# Altium PCB PreTriggerECAL_v3.PcbDoc (part 1 of 3)
Units mm, origin at the board's own origin, x right, y up, seen from the top; angles counter-clockwise.
Board outline 200 x 130 mm, 8 copper layers (Top Layer, Internal Plane 1, Mid-Layer 1, Mid-Layer 2, Mid-Layer 3, Mid-Layer 4, Mid-Layer 5, Bottom Layer), stack 1.695 mm thick; 121 components, 209 nets, 2107 pads, 421 vias.
Unrouted connection lines stored in the file: 26.
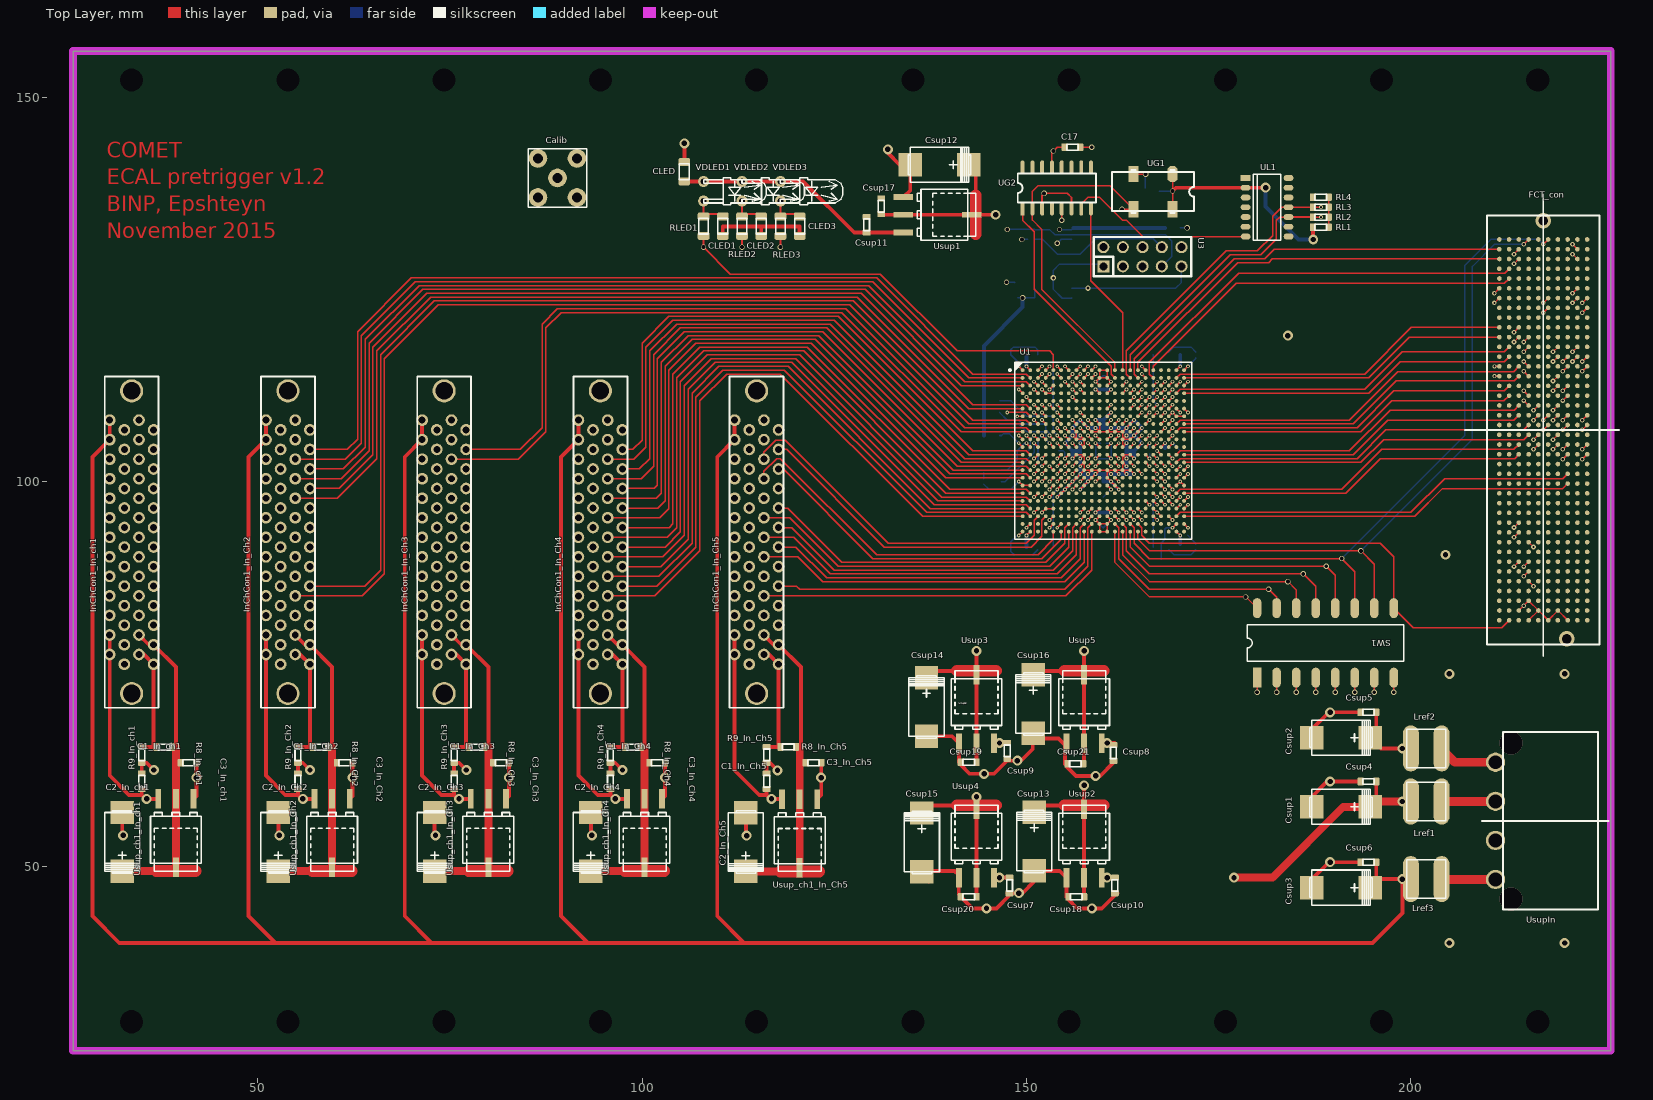
[diagram p0: Top Layer view]
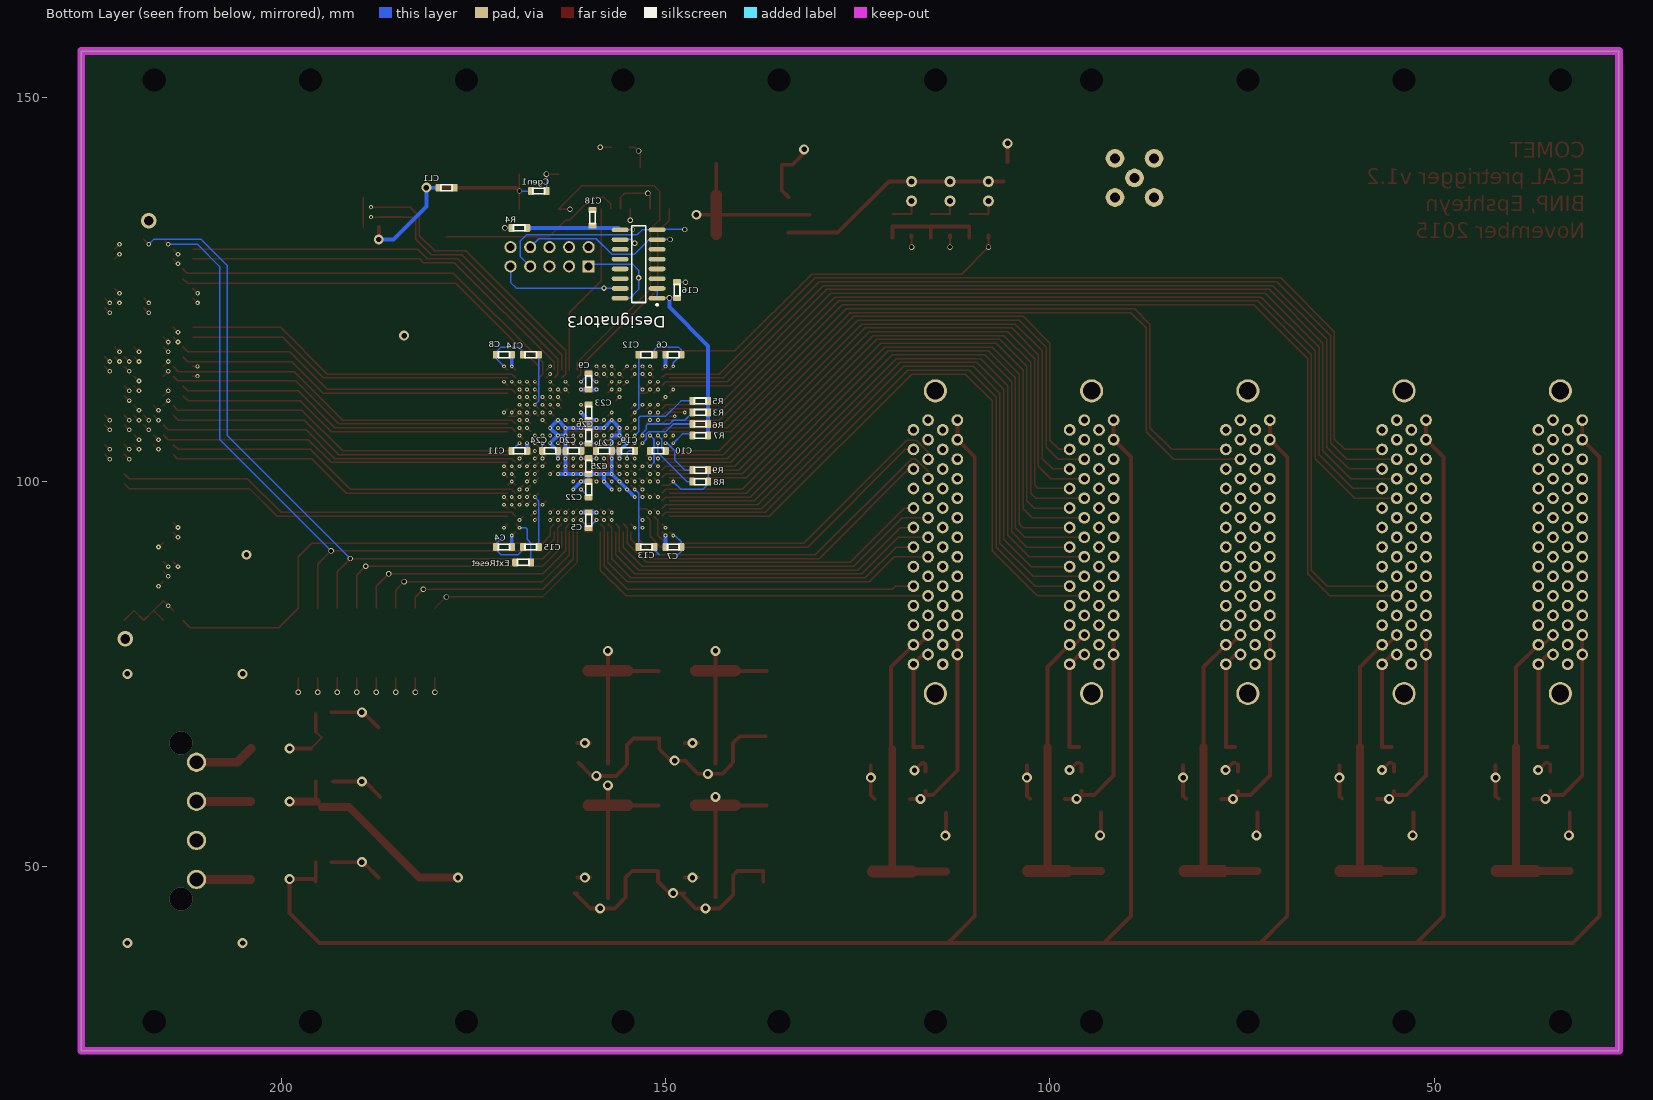
[diagram p1: Bottom Layer view, seen from below]
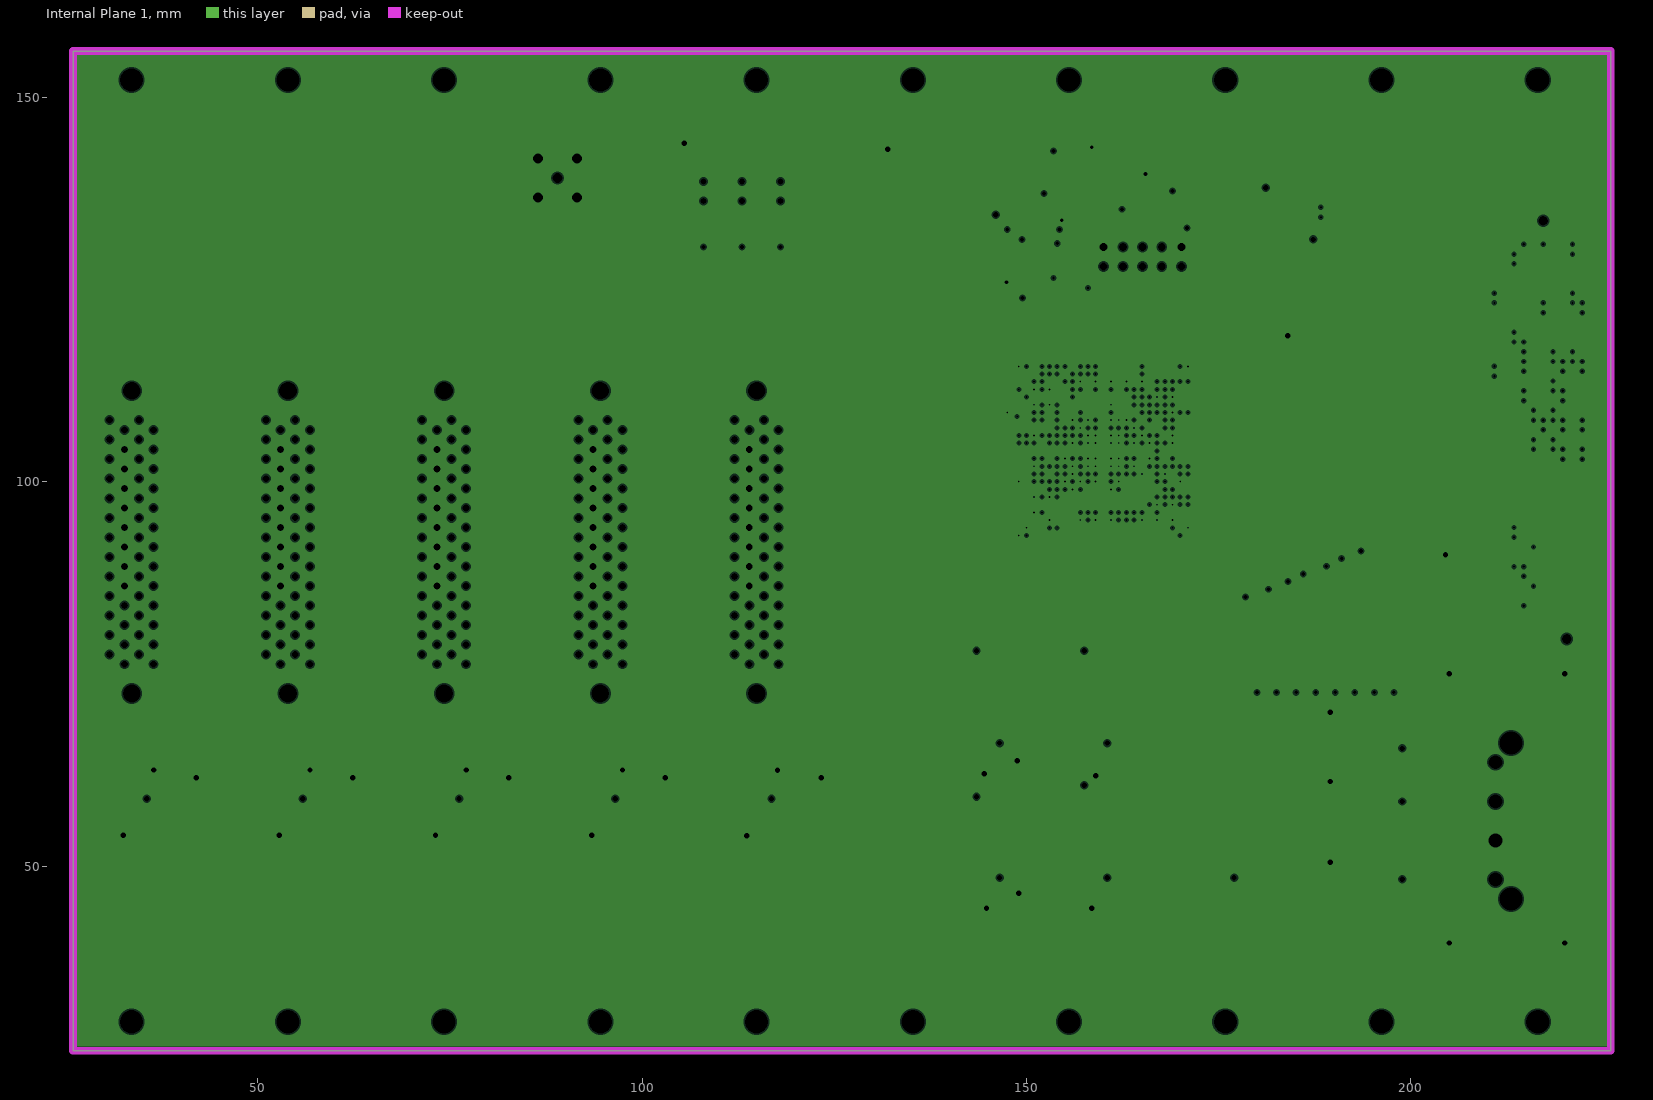
[diagram p2: Internal Plane 1, clearances drawn from the general rule]
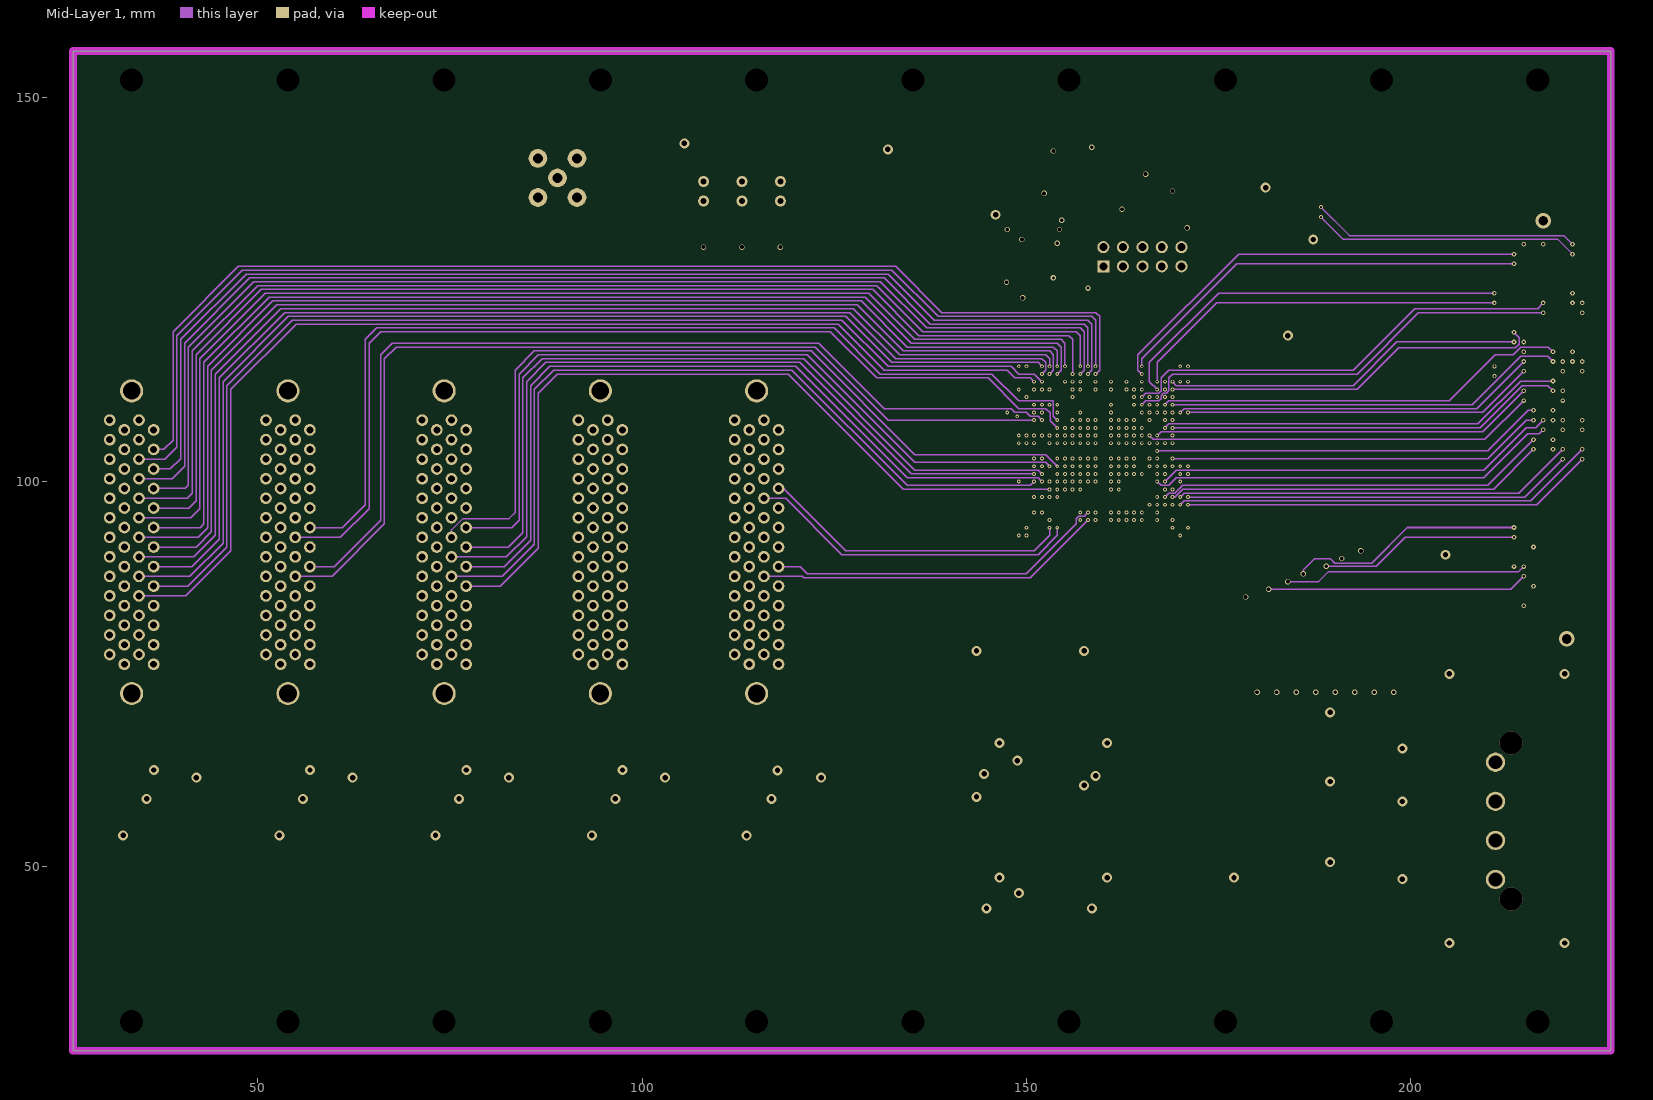
[diagram p3: Mid-Layer 1]
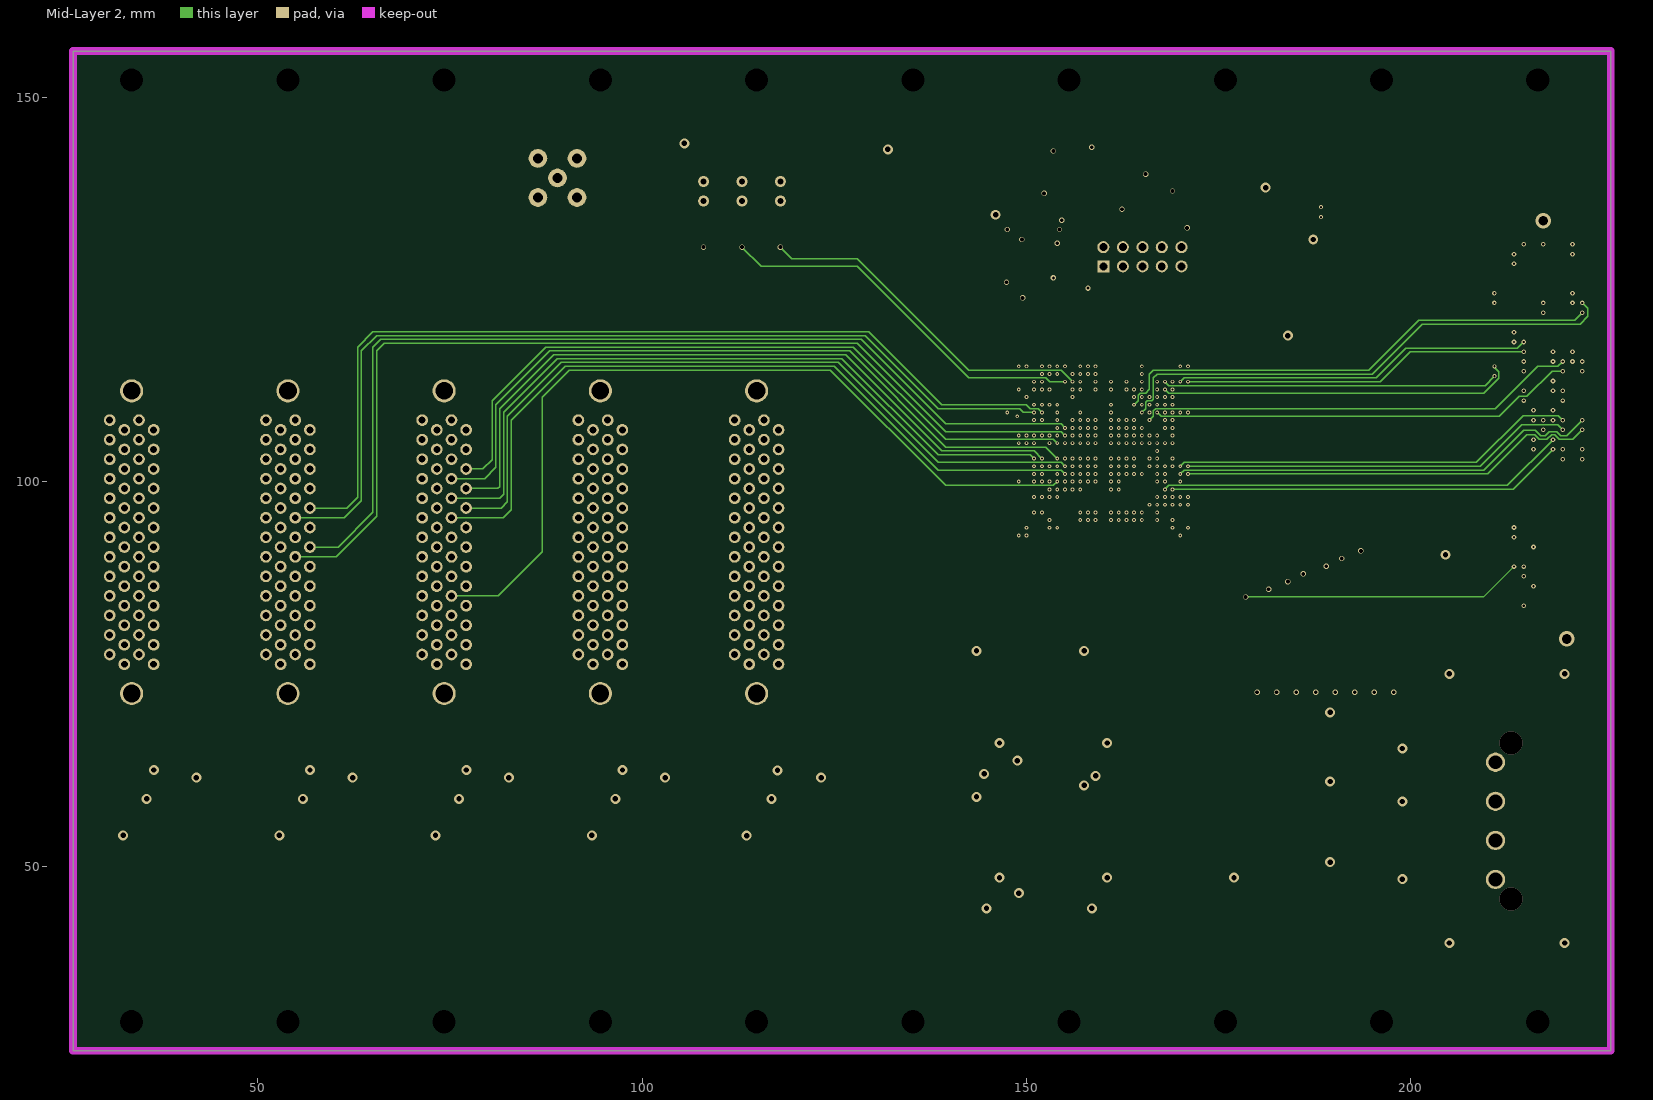
[diagram p4: Mid-Layer 2]
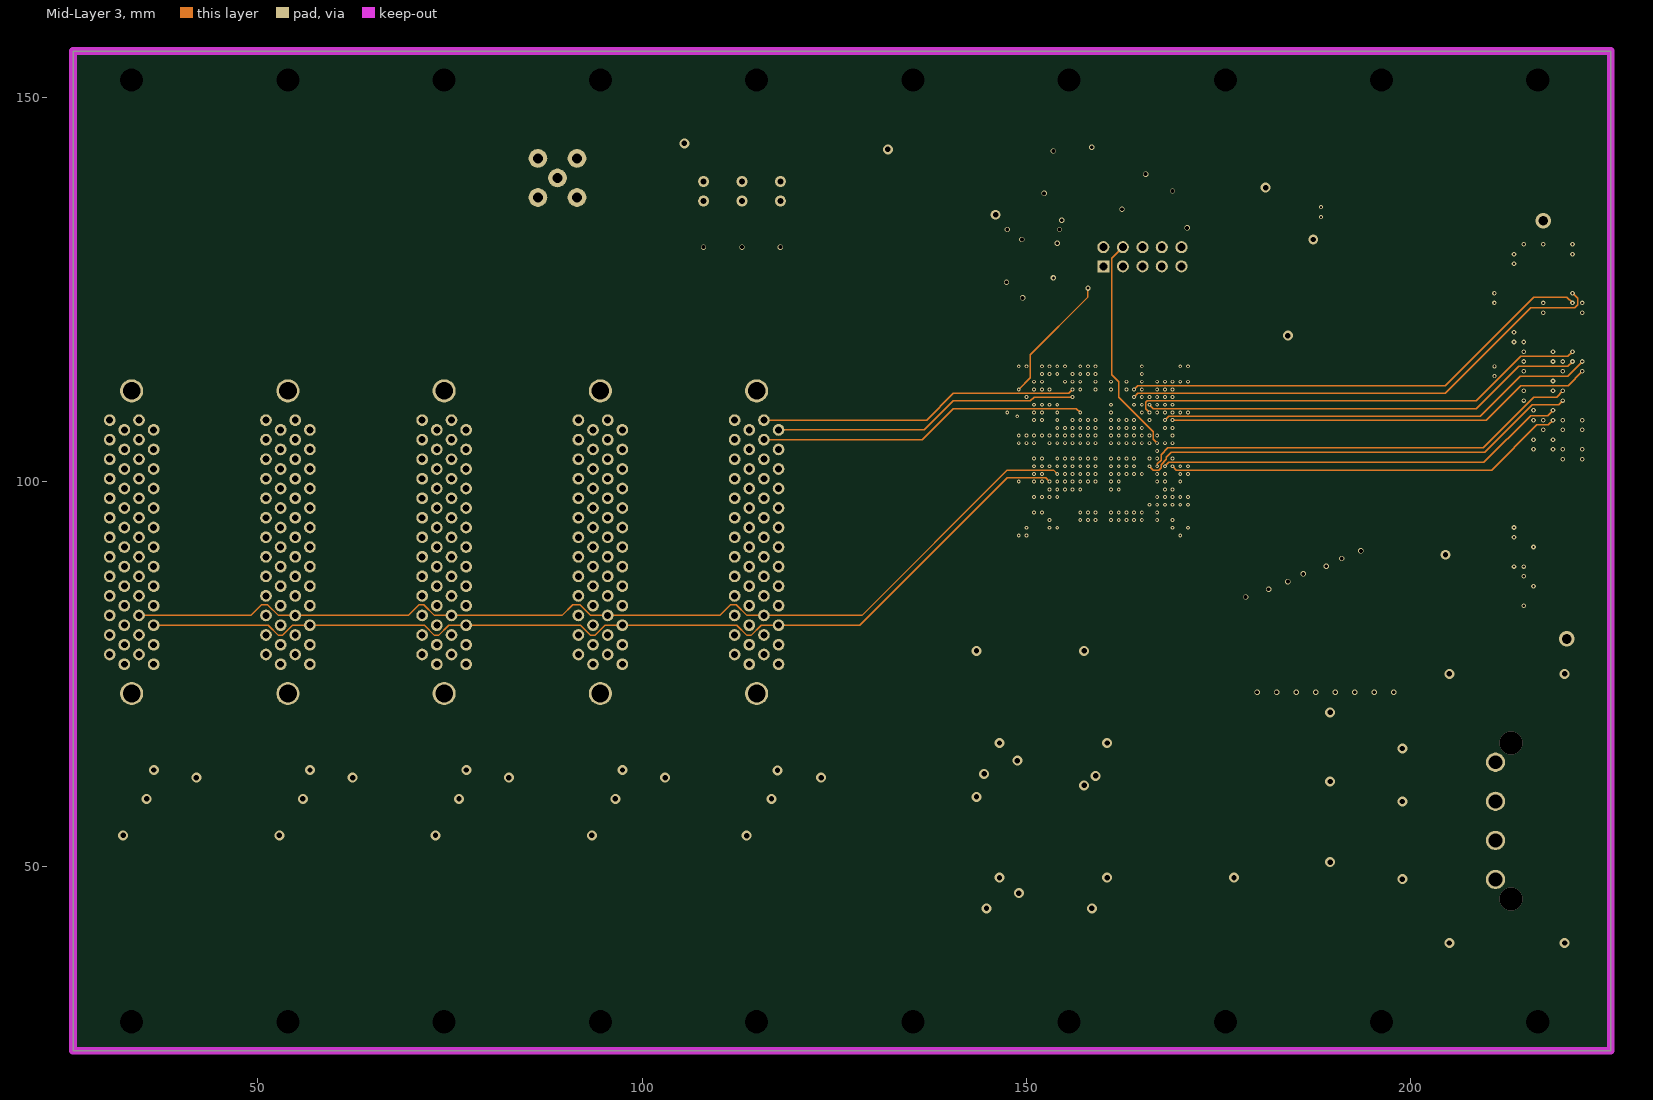
[diagram p5: Mid-Layer 3]
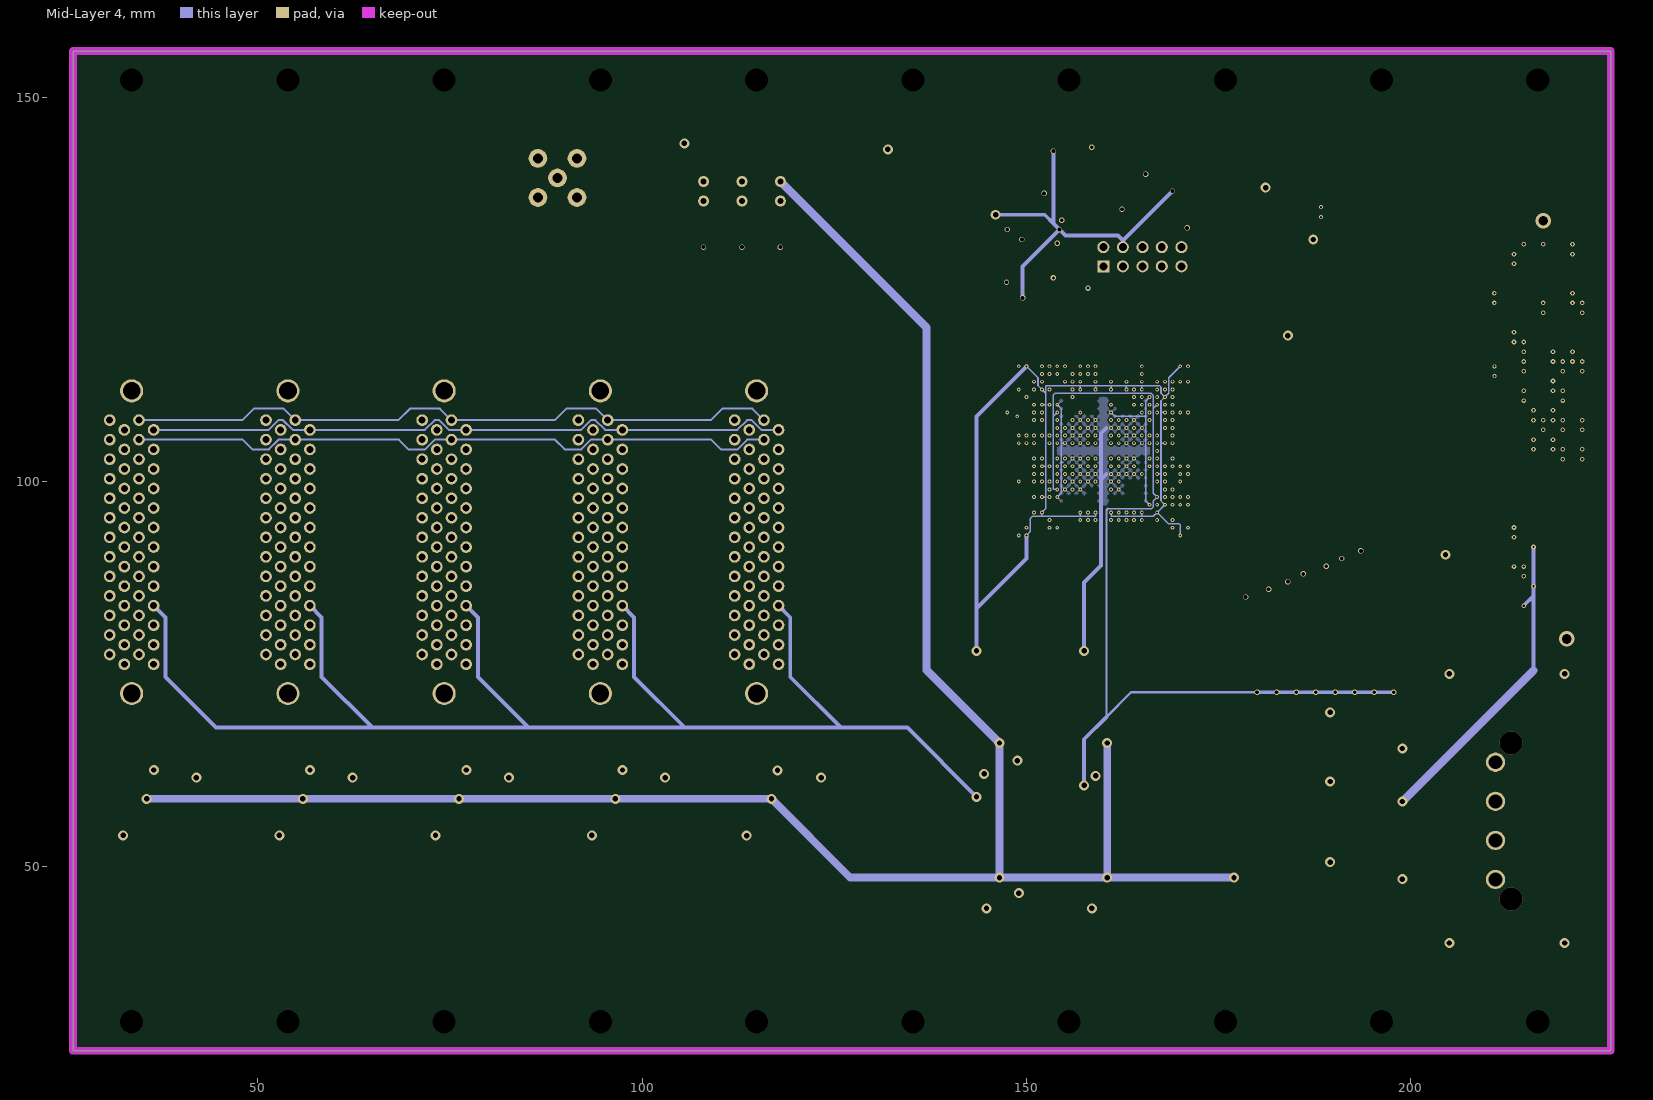
[diagram p6: Mid-Layer 4]
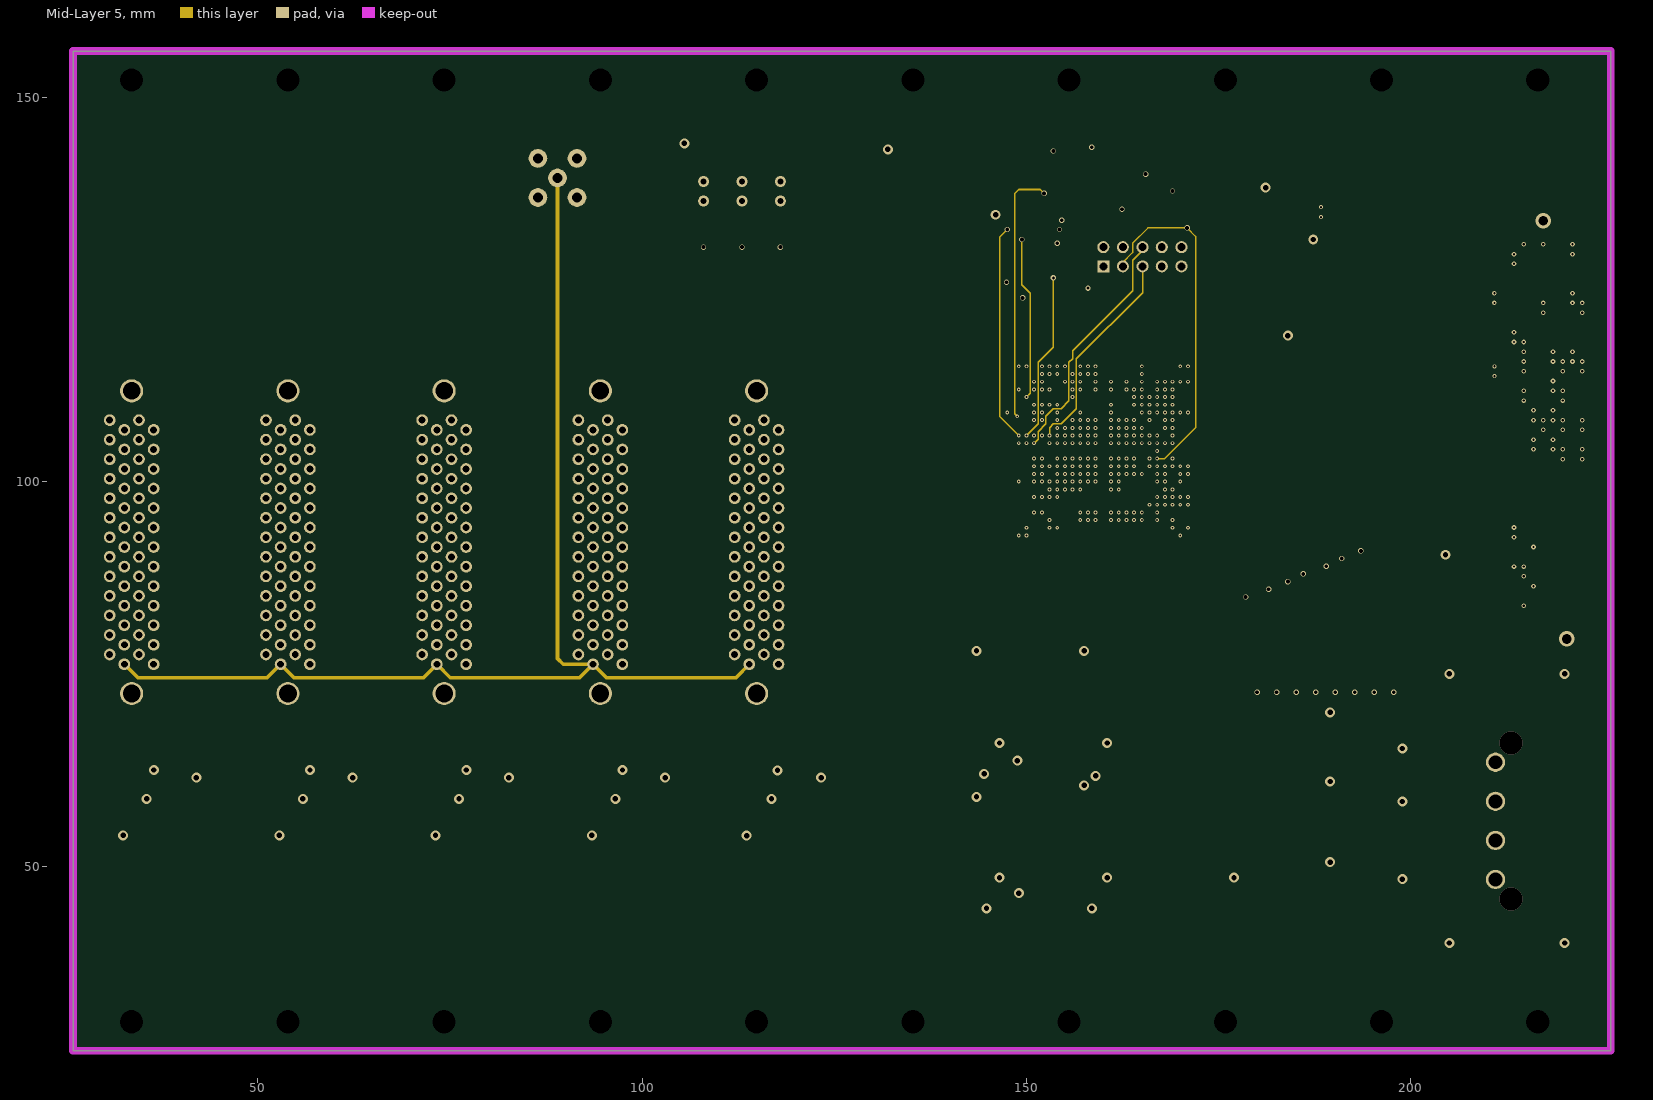
[diagram p7: Mid-Layer 5]

## Layer stack, top to bottom
Top Layer: signal copper 0.0356
Dielectric: core 0.25, FR-4, Dk 4.8
Internal Plane 1: plane copper 0.0356, net GND
Dielectric: prepreg 0.137, FR-4, Dk 4.8
Mid-Layer 1: signal copper 0.0356
Dielectric: core 0.25, FR-4, Dk 4.8
Mid-Layer 2: signal copper 0.0356
Dielectric: prepreg 0.137, FR-4, Dk 4.8
Mid-Layer 3: signal copper 0.0356
Dielectric: core 0.25, FR-4, Dk 4.8
Mid-Layer 4: signal copper 0.0356
Dielectric: prepreg 0.137, FR-4, Dk 4.8
Mid-Layer 5: signal copper 0.0356
Dielectric: core 0.25, FR-4, Dk 4.8
Bottom Layer: signal copper 0.0356

## Board outline
26,26 26,156 226,156 226,26

## Design rules (kind name [scope] priority, off if disabled: settings)
Clearance [All] p1: gap=0.2
DiffPairsRouting [All] p1: maxlimit=0.254 minlimit=0.254 mostfreqgap=0.254 maxuncoupledlength=12.7
PlaneClearance [All] p1: clearance=0.2
PlaneConnect [All] p1: planeconnectstyle=Relief reliefexpansion=0.175 reliefentries=4 reliefconductorwidth=0.175 reliefairgap=0.2
PolygonConnect PolygonConnect_1 [All] p1: connectstyle=Relief reliefconductorwidth=0.175 reliefentries=4 polygonreliefangle="90 Angle"
PolygonConnect [All] p2: connectstyle=Relief reliefconductorwidth=0.175 reliefentries=4 polygonreliefangle="45 Angle"
RoomDefinition Ref_Supply [InComponentClass('Ref_Supply')] p1: confinementstyle=ConfineIn formatcopy=TRUE lockcomponents=FALSE outline 0,0 50.8,0 50.8,25.4 0,25.4
RoomDefinition Processing [InComponentClass('Processing')] p2: confinementstyle=ConfineIn formatcopy=TRUE lockcomponents=FALSE outline 227.1,40.1 263.699,40.1 263.699,52.6 227.1,52.6
RoomDefinition Main_Trigger [InComponentClass('Main_Trigger')] p3: confinementstyle=ConfineIn formatcopy=TRUE lockcomponents=FALSE outline 227.1,27.5 235.3,27.5 235.3,38.8 227.1,38.8
RoomDefinition In_Ch5 [InComponentClass('In_Ch5')] p4: confinementstyle=ConfineIn formatcopy=TRUE lockcomponents=FALSE outline 0,0 50.8,0 50.8,25.4 0,25.4
RoomDefinition In_Ch4 [InComponentClass('In_Ch4')] p5: confinementstyle=ConfineIn formatcopy=TRUE lockcomponents=FALSE outline 0,0 50.8,0 50.8,25.4 0,25.4
RoomDefinition In_Ch3 [InComponentClass('In_Ch3')] p6: confinementstyle=ConfineIn formatcopy=TRUE lockcomponents=FALSE outline 0,0 50.8,0 50.8,25.4 0,25.4
RoomDefinition In_Ch2 [InComponentClass('In_Ch2')] p7: confinementstyle=ConfineIn formatcopy=TRUE lockcomponents=FALSE outline 0,0 50.8,0 50.8,25.4 0,25.4
RoomDefinition In_ch1 [InComponentClass('In_ch1')] p8: confinementstyle=ConfineIn formatcopy=TRUE lockcomponents=FALSE outline 0,0 50.8,0 50.8,25.4 0,25.4
RoomDefinition FCT_connector [InComponentClass('FCT_connector')] p9: confinementstyle=ConfineIn formatcopy=TRUE lockcomponents=FALSE outline 0,0 50.8,0 50.8,25.4 0,25.4
RoutingVias [All] p1: holewidth=0.5 width=0.7 viastyle="Through Hole" minholewidth=0.25 minwidth=0.5 maxholewidth=2 maxwidth=2.5
SilkscreenOverComponentPads [All] p1: minsilkscreentomaskgap=0.254
SolderMaskExpansion [All] p1: expansion=0.102
Width [All] p1: maxlimit=2 minlimit=0.15 preferedwidth=0.175
24 further rules are at their usual default settings.

## Classes and differential pairs
component class Processing: C4 C5 C6 C7 C8 C9 C10 C11 C12 C13 C14 C15 C16 C17 C18 C19 C20 C21 C22 C23 C24 C25 C26 Cgen1 CL1 ExtReset R3 R4 R5 R6 R7 R8 R9 RL1 RL2 RL3 RL4 SW1 U1 U3 UG1 UG2 UL1
component class FCT_connector: FCT_con
component class Main_Trigger: Calib CLED CLED1 CLED2 CLED3 RLED1 RLED2 RLED3 VDLED1 VDLED2 VDLED3
component class In_ch1: C1_In_ch1 C2_In_ch1 C3_In_ch1 InChCon1_In_ch1 R1_In_ch1 R2_In_ch1 R8_In_ch1 R9_In_ch1 Usup_ch1_In_ch1
component class In_Ch2: C1_In_Ch2 C2_In_Ch2 C3_In_Ch2 InChCon1_In_Ch2 R1_In_Ch2 R2_In_Ch2 R8_In_Ch2 R9_In_Ch2 Usup_ch1_In_Ch2
component class In_Ch3: C1_In_Ch3 C2_In_Ch3 C3_In_Ch3 C3_Input_channels3 InChCon1_In_Ch3 R1_In_Ch3 R2_In_Ch3 R8_In_Ch3 R9_In_Ch3 Usup_ch1_In_Ch3
component class In_Ch4: C1_In_Ch4 C2_In_Ch4 C3_In_Ch4 InChCon1_In_Ch4 R1_In_Ch4 R2_In_Ch4 R8_In_Ch4 R9_In_Ch4 Usup_ch1_In_Ch4
component class In_Ch5: C1_In_Ch5 C2_In_Ch5 C2_Input_channels5 C3_In_Ch5 InChCon1_In_Ch5 R1_In_Ch5 R2_In_Ch5 R8_In_Ch5 R9_In_Ch5 Usup_ch1_In_Ch5
channel class In-Channels: Input_channels1 Input_channels2 Input_channels3 Input_channels4 Input_channels5
component class Ref_Supply: Csup1 Csup2 Csup3 Csup4 Csup5 Csup6 Csup7 Csup8 Csup9 Csup10 Csup13 Csup14 Csup15 Csup16 Csup18 Csup19 Csup20 Csup21 Lref1 Lref2 Lref3 Usup2 Usup3 Usup4 Usup5 UsupIn
differential pair PART5_DIGCH8: +PART5_DIGCH8_P -PART5_DIGCH8_N
differential pair PART5_DIGCH7: +PART5_DIGCH7_P -PART5_DIGCH7_N
differential pair PART5_DIGCH6: +PART5_DIGCH6_P -PART5_DIGCH6_N
differential pair PART5_DIGCH5: +PART5_DIGCH5_P -PART5_DIGCH5_N
differential pair PART5_DIGCH4: +PART5_DIGCH4_P -PART5_DIGCH4_N
differential pair PART5_DIGCH3: +PART5_DIGCH3_P -PART5_DIGCH3_N
differential pair PART5_DIGCH2: +PART5_DIGCH2_P -PART5_DIGCH2_N
differential pair PART5_DIGCH1: +PART5_DIGCH1_P -PART5_DIGCH1_N
differential pair PART4_DIGCH8: +PART4_DIGCH8_P -PART4_DIGCH8_N
differential pair PART4_DIGCH7: +PART4_DIGCH7_P -PART4_DIGCH7_N
differential pair PART4_DIGCH6: +PART4_DIGCH6_P -PART4_DIGCH6_N
differential pair PART4_DIGCH5: +PART4_DIGCH5_P -PART4_DIGCH5_N
differential pair PART4_DIGCH4: +PART4_DIGCH4_P -PART4_DIGCH4_N
differential pair PART4_DIGCH3: +PART4_DIGCH3_P -PART4_DIGCH3_N
differential pair PART4_DIGCH2: +PART4_DIGCH2_P -PART4_DIGCH2_N
differential pair PART4_DIGCH1: +PART4_DIGCH1_P -PART4_DIGCH1_N
differential pair PART3_DIGCH8: +PART3_DIGCH8_P -PART3_DIGCH8_N
differential pair PART3_DIGCH7: +PART3_DIGCH7_P -PART3_DIGCH7_N
differential pair PART3_DIGCH6: +PART3_DIGCH6_P -PART3_DIGCH6_N
differential pair PART3_DIGCH5: +PART3_DIGCH5_P -PART3_DIGCH5_N
differential pair PART3_DIGCH4: +PART3_DIGCH4_P -PART3_DIGCH4_N
differential pair PART3_DIGCH3: +PART3_DIGCH3_P -PART3_DIGCH3_N
differential pair PART3_DIGCH2: +PART3_DIGCH2_P -PART3_DIGCH2_N
differential pair PART3_DIGCH1: +PART3_DIGCH1_P -PART3_DIGCH1_N
differential pair PART2_DIGCH8: +PART2_DIGCH8_P -PART2_DIGCH8_N
differential pair PART2_DIGCH7: +PART2_DIGCH7_P -PART2_DIGCH7_N
differential pair PART2_DIGCH6: +PART2_DIGCH6_P -PART2_DIGCH6_N
differential pair PART2_DIGCH5: +PART2_DIGCH5_P -PART2_DIGCH5_N
differential pair PART2_DIGCH4: +PART2_DIGCH4_P -PART2_DIGCH4_N
differential pair PART2_DIGCH3: +PART2_DIGCH3_P -PART2_DIGCH3_N
differential pair PART2_DIGCH2: +PART2_DIGCH2_P -PART2_DIGCH2_N
differential pair PART2_DIGCH1: +PART2_DIGCH1_P -PART2_DIGCH1_N
differential pair PART1_DIGCH8: +PART1_DIGCH8_P -PART1_DIGCH8_N
differential pair PART1_DIGCH7: +PART1_DIGCH7_P -PART1_DIGCH7_N
differential pair PART1_DIGCH6: +PART1_DIGCH6_P -PART1_DIGCH6_N
differential pair PART1_DIGCH5: +PART1_DIGCH5_P -PART1_DIGCH5_N
differential pair PART1_DIGCH4: +PART1_DIGCH4_P -PART1_DIGCH4_N
differential pair PART1_DIGCH3: +PART1_DIGCH3_P -PART1_DIGCH3_N
differential pair PART1_DIGCH2: +PART1_DIGCH2_P -PART1_DIGCH2_N
differential pair PART1_DIGCH1: +PART1_DIGCH1_P -PART1_DIGCH1_N
differential pair TRIGGER: +TRIGGER_P -TRIGGER_N
differential pair "TRIGGER DATA24": +"TRIGGER DATA24_P" -"TRIGGER DATA24_N"
differential pair "TRIGGER DATA23": +"TRIGGER DATA23_P" -"TRIGGER DATA23_N"
differential pair "TRIGGER DATA22": +"TRIGGER DATA22_P" -"TRIGGER DATA22_N"
differential pair "TRIGGER DATA21": +"TRIGGER DATA21_P" -"TRIGGER DATA21_N"
differential pair "TRIGGER DATA20": +"TRIGGER DATA20_P" -"TRIGGER DATA20_N"
differential pair "TRIGGER DATA19": +"TRIGGER DATA19_P" -"TRIGGER DATA19_N"
differential pair "TRIGGER DATA18": +"TRIGGER DATA18_P" -"TRIGGER DATA18_N"
differential pair "TRIGGER DATA17": +"TRIGGER DATA17_P" -"TRIGGER DATA17_N"
differential pair "TRIGGER DATA16": +"TRIGGER DATA16_P" -"TRIGGER DATA16_N"
differential pair "TRIGGER DATA15": +"TRIGGER DATA15_P" -"TRIGGER DATA15_N"
differential pair "TRIGGER DATA14": +"TRIGGER DATA14_P" -"TRIGGER DATA14_N"
differential pair "TRIGGER DATA13": +"TRIGGER DATA13_P" -"TRIGGER DATA13_N"
differential pair "TRIGGER DATA12": +"TRIGGER DATA12_P" -"TRIGGER DATA12_N"
differential pair "TRIGGER DATA11": +"TRIGGER DATA11_P" -"TRIGGER DATA11_N"
differential pair "TRIGGER DATA10": +"TRIGGER DATA10_P" -"TRIGGER DATA10_N"
differential pair "TRIGGER DATA9": +"TRIGGER DATA9_P" -"TRIGGER DATA9_N"
differential pair "TRIGGER DATA8": +"TRIGGER DATA8_P" -"TRIGGER DATA8_N"
differential pair "TRIGGER DATA7": +"TRIGGER DATA7_P" -"TRIGGER DATA7_N"
differential pair "TRIGGER DATA6": +"TRIGGER DATA6_P" -"TRIGGER DATA6_N"
differential pair "TRIGGER DATA5": +"TRIGGER DATA5_P" -"TRIGGER DATA5_N"
differential pair "TRIGGER DATA4": +"TRIGGER DATA4_P" -"TRIGGER DATA4_N"
differential pair "TRIGGER DATA3": +"TRIGGER DATA3_P" -"TRIGGER DATA3_N"
differential pair "TRIGGER DATA2": +"TRIGGER DATA2_P" -"TRIGGER DATA2_N"
differential pair "TRIGGER DATA1": +"TRIGGER DATA1_P" -"TRIGGER DATA1_N"
differential pair "STATUS IN 4": +"STATUS IN 4_P" -"STATUS IN 4_N"
differential pair "STATUS IN 3": +"STATUS IN 3_P" -"STATUS IN 3_N"
differential pair "STATUS IN 2": +"STATUS IN 2_P" -"STATUS IN 2_N"
differential pair "STATUS IN 1": +"STATUS IN 1_P" -"STATUS IN 1_N"
differential pair "SIGNAL WINDOW": +"SIGNAL WINDOW_P" -"SIGNAL WINDOW_N"
differential pair "PRE BEAM TIME": +"PRE BEAM TIME_P" -"PRE BEAM TIME_N"
differential pair "HARD RESET": +"HARD RESET_P" -"HARD RESET_N"
differential pair FCT_CLK_160MHZ: +FCT_CLK_160MHZ_P -FCT_CLK_160MHZ_N
differential pair FCT_CLK_40MHZ: +FCT_CLK_40MHZ_P -FCT_CLK_40MHZ_N
differential pair BUSY: +BUSY_P -BUSY_N
differential pair "BEAM TIME": +"BEAM TIME_P" -"BEAM TIME_N"
differential pair ADC_CLK: +ADC_CLK_P -ADC_CLK_N

## Components (designator, comment, footprint, x,y, rotation, side; value= is the part's Value field where it differs from the comment)
C1_In_ch1 "0.47uF" chip0603 34.925,60.018 r90 top (schematic designator C1)
C1_In_Ch2 "0.47uF" chip0603 55.245,60.018 r90 top (schematic designator C1)
C1_In_Ch3 "0.47uF" chip0603 75.565,60.018 r90 top (schematic designator C1)
C1_In_Ch4 "0.47uF" chip0603 95.885,60.018 r90 top (schematic designator C1)
C1_In_Ch5 "0.47uF" chip0603 116.205,60.018 r90 top (schematic designator C1)
C2_In_ch1 "100uF" CEL-SMD300 32.385,49.35 r90 top (schematic designator C2)
C2_In_Ch2 "100uF" CEL-SMD300 52.705,49.35 r90 top (schematic designator C2)
C2_In_Ch3 "100uF" CEL-SMD300 73.025,49.35 r90 top (schematic designator C2)
C2_In_Ch4 "100uF" CEL-SMD300 93.345,49.35 r90 top (schematic designator C2)
C2_In_Ch5 "100uF" CEL-SMD300 113.5,49.3 r90 top (schematic designator C2)
C3_In_ch1 "0.47uF" chip0603 40.005,63.447 r0 top (schematic designator C3)
C3_In_Ch2 "0.47uF" chip0603 60.325,63.447 r0 top (schematic designator C3)
C3_In_Ch3 "0.47uF" chip0603 80.645,63.447 r0 top (schematic designator C3)
C3_In_Ch4 "0.47uF" chip0603 100.965,63.447 r0 top (schematic designator C3)
C3_In_Ch5 "0.47uF" chip0603 121.285,63.447 r0 top (schematic designator C3)
C4 "0.1uF" chip0603 172.032,91.5 r180 bottom
C5 "0.1uF" chip0603 160,93.968 r90 bottom
C6 "0.1uF" chip0603 147.968,116.5 r0 bottom
C7 "0.1uF" chip0603 147.968,91.5 r0 bottom
C8 "0.1uF" chip0603 172.032,116.5 r180 bottom
C9 "0.1uF" chip0603 160,114.032 r270 bottom
C10 "0.1uF" chip0603 149.968,104 r0 bottom
C11 "0.1uF" chip0603 170.032,104 r180 bottom
C12 "0.1uF" chip0603 151.468,116.5 r0 bottom
C13 "0.1uF" chip0603 151.468,91.5 r0 bottom
C14 "0.1uF" chip0603 168.532,116.5 r180 bottom
C15 "0.1uF" chip0603 168.532,91.5 r180 bottom
C16 "0.1uF" chip0603 148.5,125.932 r270 bottom
C17 "0.1uF" chip0603 157,143.5 r180 top
C18 "2.2uF" chip0603 159.5,133.3 r90 bottom
C19 "0.1uF" chip0603 153.968,104 r0 bottom
C20 "0.1uF" chip0603 160.968,104 r0 bottom
C21 "0.1uF" chip0603 159.032,104 r180 bottom
C22 "0.1uF" chip0603 160,97.968 r90 bottom
C23 "0.1uF" chip0603 160,110.032 r270 bottom
C24 "0.1uF" chip0603 166.032,104 r180 bottom
C25 "0.1uF" chip0603 160,103.032 r270 bottom
C26 "0.1uF" chip0603 160,104.968 r90 bottom
Calib "LEMO" LEMO 89,139.5 r0 top
Cgen1 "0.1uF" chip0603 165.468,137.8 r0 bottom
CL1 "0.47uF" chip0603 179.5,138.23 r180 bottom
CLED "0.1M" chip0805 105.5,139.04 r90 top
CLED1 "0.1M" chip0805 110.5,134.5 r270 top
CLED2 "0.1M" chip0805 115.5,134.5 r270 top
CLED3 "0.1M" chip0805 120.5,134.5 r270 top
Csup1 "100uF" CEL-SMD300 194.7,57.7 r180 top
Csup2 "100uF" CEL-SMD300 194.7,66.7 r180 top
Csup3 "100uF" CEL-SMD300 194.7,47.2 r180 top
Csup4 "0.47uF" chip0603 195.5,61 r180 top
Csup5 "0.47uF" chip0603 195.5,70 r180 top
Csup6 "0.47uF" chip0603 195.5,50.5 r180 top
Csup7 "0.47uF" chip0603 147.8,48.5 r270 top
Csup8 "0.47uF" chip0603 161.31,65.734 r270 top
Csup9 "0.47uF" chip0603 147.5,66 r270 top
Csup10 "0.47uF" chip0603 161.5,48.5 r270 top
Csup11 "0.47uF" chip0603 129.2,132.4 r90 top
Csup12 "100uF" CEL-SMD300 142.5,141.214 r180 top
Csup13 "100uF" CEL-SMD300 151,57 r270 top
Csup14 "100uF" CEL-SMD300 137,74.5 r270 top
Csup15 "100uF" CEL-SMD300 136.4,56.9 r270 top
Csup16 "100uF" CEL-SMD300 150.896,74.878 r270 top
Csup17 "0.47uF" chip0603 131.1,134.8 r90 top
Csup18 "0.47uF" chip0603 157.5,46 r180 top
Csup19 "0.47uF" chip0603 143.5,63.5 r180 top
Csup20 "0.47uF" chip0603 143.5,46 r180 top
Csup21 "0.47uF" chip0603 157.373,63.321 r180 top
Designator3 "Comment" SOIC16_N 153.5,128.3 r0 bottom
ExtReset "200" chip0603 167.5,89.5 r0 bottom
FCT_con "SEAM-40-03.5-S-10-2-A-K-TR" SEAM-40-03.5-S-10-2-A-K-TR 211.5,131.5 r90 top
InChCon1_In_ch1 "FX2CA2-052S-1.27DSAL(71)" FX2CA2-052S-1.27DSAL(71) 37.12,70.59 r90 top (schematic designator InChCon1)
InChCon1_In_Ch2 "FX2CA2-052S-1.27DSAL(71)" FX2CA2-052S-1.27DSAL(71) 57.44,70.59 r90 top (schematic designator InChCon1)
InChCon1_In_Ch3 "FX2CA2-052S-1.27DSAL(71)" FX2CA2-052S-1.27DSAL(71) 77.76,70.59 r90 top (schematic designator InChCon1)
InChCon1_In_Ch4 "FX2CA2-052S-1.27DSAL(71)" FX2CA2-052S-1.27DSAL(71) 98.08,70.59 r90 top (schematic designator InChCon1)
InChCon1_In_Ch5 "FX2CA2-052S-1.27DSAL(71)" FX2CA2-052S-1.27DSAL(71) 118.4,70.59 r90 top (schematic designator InChCon1)
Lref1 "100mkH" SDR0604 202,58.4 r180 top
Lref2 "100mkH" SDR0604 202,65.3 r180 top
Lref3 "100mkH" SDR0604 202,48.3 r180 top
R3 "10k" chip0603 144.468,109 r0 bottom
R4 "10k" chip0603 168,133 r0 bottom
R5 "10K" chip0603 144.468,110.5 r0 bottom
R6 "10K" chip0603 144.468,107.5 r0 bottom
R7 "10K" chip0603 144.468,106 r0 bottom
R8 "10K" chip0603 144.468,101.5 r0 bottom
R8_In_ch1 "R" chip0603 36.83,65.479 r0 top (schematic designator R8)
R8_In_Ch2 "R" chip0603 57.15,65.479 r0 top (schematic designator R8)
R8_In_Ch3 "R" chip0603 77.47,65.479 r0 top (schematic designator R8)
R8_In_Ch4 "R" chip0603 97.79,65.479 r0 top (schematic designator R8)
R8_In_Ch5 "R" chip0603 118,65.5 r0 top (schematic designator R8)
R9 "10k" chip0603 146.5,100 r180 bottom
R9_In_ch1 "R" chip0603 34.925,63.447 r90 top (schematic designator R9)
R9_In_Ch2 "R" chip0603 55.245,63.447 r90 top (schematic designator R9)
R9_In_Ch3 "R" chip0603 75.565,63.447 r90 top (schematic designator R9)
R9_In_Ch4 "R" chip0603 95.885,63.447 r90 top (schematic designator R9)
R9_In_Ch5 "R" chip0603 116.205,63.447 r90 top (schematic designator R9)
RL1 "1K2" chip0603 189.3,133.1 r180 top
RL2 "56" chip0603 189.3,134.4 r180 top
RL3 "56" chip0603 189.3,135.7 r180 top
RL4 "1K2" chip0603 189.3,137 r180 top
RLED1 "200" chip0805 108,134.5 r270 top
RLED2 "300" chip0805 113,134.5 r270 top
RLED3 "300" chip0805 118,134.5 r270 top
SW1 "SW DIP8" SWD4-8 180,74.5 r0 top
U1 "EP4CE55F23C6" FBGA484 160,104 r0 top
U3 "IDC-10" IDC10 160,128 r0 top
UG1 "40MHz" SG-636 169,140 r270 top
UG2 "MAX4651PP" 16SOIC150 149.5,135.5 r90 top
UL1 "DS36C200" 14SO200 178.5,139.5 r270 top
Usup1 "NCP1117-3.3V" TO-252#1 134,134.714 r270 top
Usup2 "LD1117-2.5V" TO-252#1 157.5,48.5 r0 top
Usup3 "LD1117-2.5V" TO-252#2 143.5,66 r0 top
Usup4 "LD1117-1.8V" TO-252#1 143.5,48.5 r0 top
Usup5 "LD1117-1.2" TO-252#3 157.5,66 r0 top
Usup_ch1_In_ch1 "LD1117-1.8V" TO-252#1 39.37,58.748 r180 top (schematic designator Usup_ch1)
Usup_ch1_In_Ch2 "LD1117-1.8V" TO-252#1 59.69,58.748 r180 top (schematic designator Usup_ch1)
Usup_ch1_In_Ch3 "LD1117-1.8V" TO-252#1 80.01,58.748 r180 top (schematic designator Usup_ch1)
Usup_ch1_In_Ch4 "LD1117-1.8V" TO-252#1 100.33,58.748 r180 top (schematic designator Usup_ch1)
Usup_ch1_In_Ch5 "LD1117-1.8V" TO-252#1 120.5,58.7 r180 top (schematic designator Usup_ch1)
UsupIn "PW-20-M-R" PW20-M-R 224.32,44.33 r90 top
VDLED1 "LED" LED2P5_H 108,139.04 r270 top
VDLED2 "LED" LED2P5_H 113,139.04 r270 top
VDLED3 "LED" LED2P5_H 118,139.04 r270 top

## Footprints (in the part's own frame and the unit in brackets; to place one, negate y for a bottom-side part, rotate by r counter-clockwise, add the part's x,y. Pads: shape width x height; smd on the part's side, far side on the other; paste and mask are expansions set on the pad)
14SO200 [mil]
  rect 30x50 smd: 1(0,0)
  oval 30x50 smd: 2(50,0) 3(100,0) 4(150,0) 5(200,0) 6(250,0) 7(300,0) 8(300,220) 9(250,220) 10(200,220) 11(150,220) 12(100,220) 13(50,220) 14(0,220)
  silkscreen extent -20,40 320,180
16SOIC150 [mil]
  rect 70x20 smd: 1(0,0)
  oval 70x20 smd: 2(0,-50) 3(0,-100) 4(0,-150) 5(0,-200) 6(0,-250) 7(0,-300) 8(0,-350) 9(212,-350) 10(212,-300) 11(212,-250) 12(212,-200) 13(212,-150) 14(212,-100) 15(212,-50) 16(212,0)
  silkscreen extent 31,-375 181,25
CEL-SMD300 [mil]
  rect 120x120 smd: +(0,0) -(300,0)
  silkscreen extent -10,-90 310,90
chip0603 [mil]
  oval 12x40 smd: 1(-10,0) 1(0,0) 1(10,0) 2(70,0) 2(80,0) 2(90,0)
  oval 32x12 smd: 1(0,14) 1(0,-14) 2(80,-14) 2(80,14)
  silkscreen extent 10,-15 70,15
chip0805 [mil]
  oval 20x60 smd: 1(-10,0) 1(0,0) 1(10,0) 2(90,0) 2(100,0) 2(110,0)
  oval 40x20 smd: 1(0,20) 1(0,-20) 2(100,-20) 2(100,20)
  silkscreen extent 10,-25 90,25
FBGA484 [mm] "BGA, 484-Leads, Body 23x23mm, Pitch 1mm"
  round 0.5 smd: A1(-10.5,10.5) A2(-9.5,10.5) A3(-8.5,10.5) A4(-7.5,10.5) A5(-6.5,10.5) A6(-5.5,10.5) A7(-4.5,10.5) A8(-3.5,10.5) A9(-2.5,10.5) A10(-1.5,10.5) A11(-0.5,10.5) A12(0.5,10.5) A13(1.5,10.5) A14(2.5,10.5) A15(3.5,10.5) A16(4.5,10.5) A17(5.5,10.5) A18(6.5,10.5) A19(7.5,10.5) A20(8.5,10.5) A21(9.5,10.5) A22(10.5,10.5) AA1(-10.5,-9.5) AA2(-9.5,-9.5) AA3(-8.5,-9.5) AA4(-7.5,-9.5) AA5(-6.5,-9.5) AA6(-5.5,-9.5) AA7(-4.5,-9.5) AA8(-3.5,-9.5) AA9(-2.5,-9.5) AA10(-1.5,-9.5) AA11(-0.5,-9.5) AA12(0.5,-9.5) AA13(1.5,-9.5) AA14(2.5,-9.5) AA15(3.5,-9.5) AA16(4.5,-9.5) AA17(5.5,-9.5) AA18(6.5,-9.5) AA19(7.5,-9.5) AA20(8.5,-9.5) AA21(9.5,-9.5) AA22(10.5,-9.5) AB1(-10.5,-10.5) AB2(-9.5,-10.5) AB3(-8.5,-10.5) AB4(-7.5,-10.5) AB5(-6.5,-10.5) AB6(-5.5,-10.5) AB7(-4.5,-10.5) AB8(-3.5,-10.5) AB9(-2.5,-10.5) AB10(-1.5,-10.5) AB11(-0.5,-10.5) AB12(0.5,-10.5) AB13(1.5,-10.5) AB14(2.5,-10.5) AB15(3.5,-10.5) AB16(4.5,-10.5) AB17(5.5,-10.5) AB18(6.5,-10.5) AB19(7.5,-10.5) AB20(8.5,-10.5) AB21(9.5,-10.5) AB22(10.5,-10.5) B1(-10.5,9.5) B2(-9.5,9.5) B3(-8.5,9.5) B4(-7.5,9.5) B5(-6.5,9.5) B6(-5.5,9.5) B7(-4.5,9.5) B8(-3.5,9.5) B9(-2.5,9.5) B10(-1.5,9.5) B11(-0.5,9.5) B12(0.5,9.5) B13(1.5,9.5) B14(2.5,9.5) B15(3.5,9.5) B16(4.5,9.5) B17(5.5,9.5) B18(6.5,9.5) B19(7.5,9.5) B20(8.5,9.5) B21(9.5,9.5) B22(10.5,9.5) C1(-10.5,8.5) C2(-9.5,8.5) C3(-8.5,8.5) C4(-7.5,8.5) C5(-6.5,8.5) C6(-5.5,8.5) C7(-4.5,8.5) C8(-3.5,8.5) C9(-2.5,8.5) C10(-1.5,8.5) C11(-0.5,8.5) C12(0.5,8.5) C13(1.5,8.5) C14(2.5,8.5) C15(3.5,8.5) C16(4.5,8.5) C17(5.5,8.5) C18(6.5,8.5) C19(7.5,8.5) C20(8.5,8.5) C21(9.5,8.5) C22(10.5,8.5) D1(-10.5,7.5) D2(-9.5,7.5) D3(-8.5,7.5) D4(-7.5,7.5) D5(-6.5,7.5) D6(-5.5,7.5) D7(-4.5,7.5) D8(-3.5,7.5) D9(-2.5,7.5) D10(-1.5,7.5) D11(-0.5,7.5) D12(0.5,7.5) D13(1.5,7.5) D14(2.5,7.5) D15(3.5,7.5) D16(4.5,7.5) D17(5.5,7.5) D18(6.5,7.5) D19(7.5,7.5) D20(8.5,7.5) D21(9.5,7.5) D22(10.5,7.5) E1(-10.5,6.5) E2(-9.5,6.5) E3(-8.5,6.5) E4(-7.5,6.5) E5(-6.5,6.5) E6(-5.5,6.5) E7(-4.5,6.5) E8(-3.5,6.5) E9(-2.5,6.5) E10(-1.5,6.5) E11(-0.5,6.5) E12(0.5,6.5) E13(1.5,6.5) E14(2.5,6.5) E15(3.5,6.5) E16(4.5,6.5) E17(5.5,6.5) E18(6.5,6.5) E19(7.5,6.5) E20(8.5,6.5) E21(9.5,6.5) E22(10.5,6.5) F1(-10.5,5.5) F2(-9.5,5.5) F3(-8.5,5.5) F4(-7.5,5.5) F5(-6.5,5.5) F6(-5.5,5.5) F7(-4.5,5.5) F8(-3.5,5.5) F9(-2.5,5.5) F10(-1.5,5.5) F11(-0.5,5.5) F12(0.5,5.5) F13(1.5,5.5) F14(2.5,5.5) F15(3.5,5.5) F16(4.5,5.5) F17(5.5,5.5) F18(6.5,5.5) F19(7.5,5.5) F20(8.5,5.5) F21(9.5,5.5) F22(10.5,5.5) G1(-10.5,4.5) G2(-9.5,4.5) G3(-8.5,4.5) G4(-7.5,4.5) G5(-6.5,4.5) G6(-5.5,4.5) G7(-4.5,4.5) G8(-3.5,4.5) G9(-2.5,4.5) G10(-1.5,4.5) G11(-0.5,4.5) G12(0.5,4.5) G13(1.5,4.5) G14(2.5,4.5) G15(3.5,4.5) G16(4.5,4.5) G17(5.5,4.5) G18(6.5,4.5) G19(7.5,4.5) G20(8.5,4.5) G21(9.5,4.5) G22(10.5,4.5) H1(-10.5,3.5) H2(-9.5,3.5) H3(-8.5,3.5) H4(-7.5,3.5) H5(-6.5,3.5) H6(-5.5,3.5) H7(-4.5,3.5) H8(-3.5,3.5) H9(-2.5,3.5) H10(-1.5,3.5) H11(-0.5,3.5) H12(0.5,3.5) H13(1.5,3.5) H14(2.5,3.5) H15(3.5,3.5) H16(4.5,3.5) H17(5.5,3.5) H18(6.5,3.5) H19(7.5,3.5) H20(8.5,3.5) H21(9.5,3.5) H22(10.5,3.5) J1(-10.5,2.5) J2(-9.5,2.5) J3(-8.5,2.5) J4(-7.5,2.5) J5(-6.5,2.5) J6(-5.5,2.5) J7(-4.5,2.5) J8(-3.5,2.5) J9(-2.5,2.5) J10(-1.5,2.5) J11(-0.5,2.5) J12(0.5,2.5) J13(1.5,2.5) J14(2.5,2.5) J15(3.5,2.5) J16(4.5,2.5) J17(5.5,2.5) J18(6.5,2.5) J19(7.5,2.5) J20(8.5,2.5) J21(9.5,2.5) J22(10.5,2.5) K1(-10.5,1.5) K2(-9.5,1.5) K3(-8.5,1.5) K4(-7.5,1.5) K5(-6.5,1.5) K6(-5.5,1.5) K7(-4.5,1.5) K8(-3.5,1.5) K9(-2.5,1.5) K10(-1.5,1.5) K11(-0.5,1.5) K12(0.5,1.5) K13(1.5,1.5) K14(2.5,1.5) K15(3.5,1.5) K16(4.5,1.5) K17(5.5,1.5) K18(6.5,1.5) K19(7.5,1.5) K20(8.5,1.5) K21(9.5,1.5) K22(10.5,1.5) L1(-10.5,0.5) L2(-9.5,0.5) L3(-8.5,0.5) L4(-7.5,0.5) L5(-6.5,0.5) L6(-5.5,0.5) L7(-4.5,0.5) L8(-3.5,0.5) L9(-2.5,0.5) L10(-1.5,0.5) L11(-0.5,0.5) L12(0.5,0.5) L13(1.5,0.5) L14(2.5,0.5) L15(3.5,0.5) L16(4.5,0.5) L17(5.5,0.5) L18(6.5,0.5) L19(7.5,0.5) L20(8.5,0.5) L21(9.5,0.5) L22(10.5,0.5) M1(-10.5,-0.5) M2(-9.5,-0.5) M3(-8.5,-0.5) M4(-7.5,-0.5) M5(-6.5,-0.5) M6(-5.5,-0.5) M7(-4.5,-0.5) M8(-3.5,-0.5) M9(-2.5,-0.5) M10(-1.5,-0.5) M11(-0.5,-0.5) M12(0.5,-0.5) M13(1.5,-0.5) M14(2.5,-0.5) M15(3.5,-0.5) M16(4.5,-0.5) M17(5.5,-0.5) M18(6.5,-0.5) M19(7.5,-0.5) M20(8.5,-0.5) M21(9.5,-0.5) M22(10.5,-0.5) N1(-10.5,-1.5) N2(-9.5,-1.5) N3(-8.5,-1.5) N4(-7.5,-1.5) N5(-6.5,-1.5) N6(-5.5,-1.5) N7(-4.5,-1.5) N8(-3.5,-1.5) N9(-2.5,-1.5) N10(-1.5,-1.5) N11(-0.5,-1.5) N12(0.5,-1.5) N13(1.5,-1.5) N14(2.5,-1.5) N15(3.5,-1.5) N16(4.5,-1.5) N17(5.5,-1.5) N18(6.5,-1.5) N19(7.5,-1.5) N20(8.5,-1.5) N21(9.5,-1.5) N22(10.5,-1.5) P1(-10.5,-2.5) P2(-9.5,-2.5) P3(-8.5,-2.5) P4(-7.5,-2.5) P5(-6.5,-2.5) P6(-5.5,-2.5) P7(-4.5,-2.5) P8(-3.5,-2.5) P9(-2.5,-2.5) P10(-1.5,-2.5) P11(-0.5,-2.5) P12(0.5,-2.5) P13(1.5,-2.5) P14(2.5,-2.5) P15(3.5,-2.5) P16(4.5,-2.5) P17(5.5,-2.5) P18(6.5,-2.5) P19(7.5,-2.5) P20(8.5,-2.5) P21(9.5,-2.5) P22(10.5,-2.5) R1(-10.5,-3.5) R2(-9.5,-3.5) R3(-8.5,-3.5) R4(-7.5,-3.5) R5(-6.5,-3.5) R6(-5.5,-3.5) R7(-4.5,-3.5) R8(-3.5,-3.5) R9(-2.5,-3.5) R10(-1.5,-3.5) R11(-0.5,-3.5) R12(0.5,-3.5) R13(1.5,-3.5) R14(2.5,-3.5) R15(3.5,-3.5) R16(4.5,-3.5) R17(5.5,-3.5) R18(6.5,-3.5) R19(7.5,-3.5) R20(8.5,-3.5) R21(9.5,-3.5) R22(10.5,-3.5) T1(-10.5,-4.5) T2(-9.5,-4.5) T3(-8.5,-4.5) T4(-7.5,-4.5) T5(-6.5,-4.5) T6(-5.5,-4.5) T7(-4.5,-4.5) T8(-3.5,-4.5) T9(-2.5,-4.5) T10(-1.5,-4.5) T11(-0.5,-4.5) T12(0.5,-4.5) T13(1.5,-4.5) T14(2.5,-4.5) T15(3.5,-4.5) T16(4.5,-4.5) T17(5.5,-4.5) T18(6.5,-4.5) T19(7.5,-4.5) T20(8.5,-4.5) T21(9.5,-4.5) T22(10.5,-4.5) U1(-10.5,-5.5) U2(-9.5,-5.5) U3(-8.5,-5.5) U4(-7.5,-5.5) U5(-6.5,-5.5) U6(-5.5,-5.5) U7(-4.5,-5.5) U8(-3.5,-5.5) U9(-2.5,-5.5) U10(-1.5,-5.5) U11(-0.5,-5.5) U12(0.5,-5.5) U13(1.5,-5.5) U14(2.5,-5.5) U15(3.5,-5.5) U16(4.5,-5.5) U17(5.5,-5.5) U18(6.5,-5.5) U19(7.5,-5.5) U20(8.5,-5.5) U21(9.5,-5.5) U22(10.5,-5.5) V1(-10.5,-6.5) V2(-9.5,-6.5) V3(-8.5,-6.5) V4(-7.5,-6.5) V5(-6.5,-6.5) V6(-5.5,-6.5) V7(-4.5,-6.5) V8(-3.5,-6.5) V9(-2.5,-6.5) V10(-1.5,-6.5) V11(-0.5,-6.5) V12(0.5,-6.5) V13(1.5,-6.5) V14(2.5,-6.5) V15(3.5,-6.5) V16(4.5,-6.5) V17(5.5,-6.5) V18(6.5,-6.5) V19(7.5,-6.5) V20(8.5,-6.5) V21(9.5,-6.5) V22(10.5,-6.5) W1(-10.5,-7.5) W2(-9.5,-7.5) W3(-8.5,-7.5) W4(-7.5,-7.5) W5(-6.5,-7.5) W6(-5.5,-7.5) W7(-4.5,-7.5) W8(-3.5,-7.5) W9(-2.5,-7.5) W10(-1.5,-7.5) W11(-0.5,-7.5) W12(0.5,-7.5) W13(1.5,-7.5) W14(2.5,-7.5) W15(3.5,-7.5) W16(4.5,-7.5) W17(5.5,-7.5) W18(6.5,-7.5) W19(7.5,-7.5) W20(8.5,-7.5) W21(9.5,-7.5) W22(10.5,-7.5) Y1(-10.5,-8.5) Y2(-9.5,-8.5) Y3(-8.5,-8.5) Y4(-7.5,-8.5) Y5(-6.5,-8.5) Y6(-5.5,-8.5) Y7(-4.5,-8.5) Y8(-3.5,-8.5) Y9(-2.5,-8.5) Y10(-1.5,-8.5) Y11(-0.5,-8.5) Y12(0.5,-8.5) Y13(1.5,-8.5) Y14(2.5,-8.5) Y15(3.5,-8.5) Y16(4.5,-8.5) Y17(5.5,-8.5) Y18(6.5,-8.5) Y19(7.5,-8.5) Y20(8.5,-8.5) Y21(9.5,-8.5) Y22(10.5,-8.5)
  silkscreen extent -12.27,-11.5 11.5,11.5, body extent -11.5,-11.5 11.5,11.5, height 3.5
FX2CA2-052S-1.27DSAL(71) [mm]
  round 3 hole 2.3: 27(1.85,3.5) 28(41.22,3.5)
  round 1.524 hole 0.9: A1(37.41,2.548) A2(36.14,0.643) A3(34.87,2.548) A4(33.6,0.643) A5(32.33,2.548) A6(31.06,0.643) A7(29.79,2.548) A8(28.52,0.643) A9(27.25,2.548) A10(25.98,0.643) A11(24.71,2.548) A12(23.44,0.643) A13(22.17,2.548) A14(20.9,0.643) A15(19.63,2.548) A16(18.36,0.643) A17(17.09,2.548) A18(15.82,0.643) A19(14.55,2.548) A20(13.28,0.643) A21(12.01,2.548) A22(10.74,0.643) A23(9.47,2.548) A24(8.2,0.643) A25(6.93,2.548) A26(5.66,0.643) B1(37.41,6.358) B2(36.14,4.453) B3(34.87,6.358) B4(33.6,4.453) B5(32.33,6.358) B6(31.06,4.453) B7(29.79,6.358) B8(28.52,4.453) B9(27.25,6.358) B10(25.98,4.453) B11(24.71,6.358) B12(23.44,4.453) B13(22.17,6.358) B14(20.9,4.453) B15(19.63,6.358) B16(18.36,4.453) B17(17.09,6.358) B18(15.82,4.453) B19(14.55,6.358) B20(13.28,4.453) B21(12.01,6.358) B22(10.74,4.453) B23(9.47,6.358) B24(8.2,4.453) B25(6.93,6.358) B26(5.66,4.453)
  silkscreen extent 0,0 43.07,7
IDC10 [mil]
  rect 62x62 hole 40: 1(0,0)
  round 62 hole 40: 2(0,98.43) 3(100,0) 4(100,98.43) 5(200.79,0) 6(200.79,98.43) 7(299.21,0) 8(299.21,98.43) 9(400,0) 10(400,98.43)
  silkscreen extent -50,-50 450,150
LED2P5_H [mil]
  round 56 hole 32: ANOD(0,0) CATH(100,0)
  silkscreen extent -20,0 120,320
LEMO [mil]
  round 96 hole 52: SHIELD(-100,-100) SHIELD(-100,100) SHIELD(100,-100) SHIELD(100,100) WIRE(0,0)
  silkscreen extent -150,-150 150,150
PW20-M-R [mm]
  round 2.5 hole 1.8: 1(19.17,13.32) 2(14.09,13.32) 3(9.01,13.32) 4(3.93,13.32)
  silkscreen extent 0,-1.4 23.1,15.1
SDR0604 [mm]
  oval 2.1x6 smd: 1(-2,0) 2(2,0)
  silkscreen extent -2.55,-2.5 2.55,2.5
SEAM-40-03.5-S-10-2-A-K-TR [mm]
  round 0.6 smd: A1(0,0) A2(-1.27,0) A3(-2.54,0) A4(-3.81,0) A5(-5.08,0) A6(-6.35,0) A7(-7.62,0) A8(-8.89,0) A9(-10.16,0) A10(-11.43,0) A11(-12.7,0) A12(-13.97,0) A13(-15.24,0) A14(-16.51,0) A15(-17.78,0) A16(-19.05,0) A17(-20.32,0) A18(-21.59,0) A19(-22.86,0) A20(-24.13,0) A21(-25.4,0) A22(-26.67,0) A23(-27.94,0) A24(-29.21,0) A25(-30.48,0) A26(-31.75,0) A27(-33.02,0) A28(-34.29,0) A29(-35.56,0) A30(-36.83,0) A31(-38.1,0) A32(-39.37,0) A33(-40.64,0) A34(-41.91,0) A35(-43.18,0) A36(-44.45,0) A37(-45.72,0) A38(-46.99,0) A39(-48.26,0) A40(-49.53,0) B1(0,-1.27) B2(-1.27,-1.27) B3(-2.54,-1.27) B4(-3.81,-1.27) B5(-5.08,-1.27) B6(-6.35,-1.27) B7(-7.62,-1.27) B8(-8.89,-1.27) B9(-10.16,-1.27) B10(-11.43,-1.27) B11(-12.7,-1.27) B12(-13.97,-1.27) B13(-15.24,-1.27) B14(-16.51,-1.27) B15(-17.78,-1.27) B16(-19.05,-1.27) B17(-20.32,-1.27) B18(-21.59,-1.27) B19(-22.86,-1.27) B20(-24.13,-1.27) B21(-25.4,-1.27) B22(-26.67,-1.27) B23(-27.94,-1.27) B24(-29.21,-1.27) B25(-30.48,-1.27) B26(-31.75,-1.27) B27(-33.02,-1.27) B28(-34.29,-1.27) B29(-35.56,-1.27) B30(-36.83,-1.27) B31(-38.1,-1.27) B32(-39.37,-1.27) B33(-40.64,-1.27) B34(-41.91,-1.27) B35(-43.18,-1.27) B36(-44.45,-1.27) B37(-45.72,-1.27) B38(-46.99,-1.27) B39(-48.26,-1.27) B40(-49.53,-1.27) C1(0,-2.54) C2(-1.27,-2.54) C3(-2.54,-2.54) C4(-3.81,-2.54) C5(-5.08,-2.54) C6(-6.35,-2.54) C7(-7.62,-2.54) C8(-8.89,-2.54) C9(-10.16,-2.54) C10(-11.43,-2.54) C11(-12.7,-2.54) C12(-13.97,-2.54) C13(-15.24,-2.54) C14(-16.51,-2.54) C15(-17.78,-2.54) C16(-19.05,-2.54) C17(-20.32,-2.54) C18(-21.59,-2.54) C19(-22.86,-2.54) C20(-24.13,-2.54) C21(-25.4,-2.54) C22(-26.67,-2.54) C23(-27.94,-2.54) C24(-29.21,-2.54) C25(-30.48,-2.54) C26(-31.75,-2.54) C27(-33.02,-2.54) C28(-34.29,-2.54) C29(-35.56,-2.54) C30(-36.83,-2.54) C31(-38.1,-2.54) C32(-39.37,-2.54) C33(-40.64,-2.54) C34(-41.91,-2.54) C35(-43.18,-2.54) C36(-44.45,-2.54) C37(-45.72,-2.54) C38(-46.99,-2.54) C39(-48.26,-2.54) C40(-49.53,-2.54) D1(0,-3.81) D2(-1.27,-3.81) D3(-2.54,-3.81) D4(-3.81,-3.81) D5(-5.08,-3.81) D6(-6.35,-3.81) D7(-7.62,-3.81) D8(-8.89,-3.81) D9(-10.16,-3.81) D10(-11.43,-3.81) D11(-12.7,-3.81) D12(-13.97,-3.81) D13(-15.24,-3.81) D14(-16.51,-3.81) D15(-17.78,-3.81) D16(-19.05,-3.81) D17(-20.32,-3.81) D18(-21.59,-3.81) D19(-22.86,-3.81) D20(-24.13,-3.81) D21(-25.4,-3.81) D22(-26.67,-3.81) D23(-27.94,-3.81) D24(-29.21,-3.81) D25(-30.48,-3.81) D26(-31.75,-3.81) D27(-33.02,-3.81) D28(-34.29,-3.81) D29(-35.56,-3.81) D30(-36.83,-3.81) D31(-38.1,-3.81) D32(-39.37,-3.81) D33(-40.64,-3.81) D34(-41.91,-3.81) D35(-43.18,-3.81) D36(-44.45,-3.81) D37(-45.72,-3.81) D38(-46.99,-3.81) D39(-48.26,-3.81) D40(-49.53,-3.81) E1(0,-5.08) E2(-1.27,-5.08) E3(-2.54,-5.08) E4(-3.81,-5.08) E5(-5.08,-5.08) E6(-6.35,-5.08) E7(-7.62,-5.08) E8(-8.89,-5.08) E9(-10.16,-5.08) E10(-11.43,-5.08) E11(-12.7,-5.08) E12(-13.97,-5.08) E13(-15.24,-5.08) E14(-16.51,-5.08) E15(-17.78,-5.08) E16(-19.05,-5.08) E17(-20.32,-5.08) E18(-21.59,-5.08) E19(-22.86,-5.08) E20(-24.13,-5.08) E21(-25.4,-5.08) E22(-26.67,-5.08) E23(-27.94,-5.08) E24(-29.21,-5.08) E25(-30.48,-5.08) E26(-31.75,-5.08) E27(-33.02,-5.08) E28(-34.29,-5.08) E29(-35.56,-5.08) E30(-36.83,-5.08) E31(-38.1,-5.08) E32(-39.37,-5.08) E33(-40.64,-5.08) E34(-41.91,-5.08) E35(-43.18,-5.08) E36(-44.45,-5.08) E37(-45.72,-5.08) E38(-46.99,-5.08) E39(-48.26,-5.08) E40(-49.53,-5.08) F1(0,-6.35) F2(-1.27,-6.35) F3(-2.54,-6.35) F4(-3.81,-6.35) F5(-5.08,-6.35) F6(-6.35,-6.35) F7(-7.62,-6.35) F8(-8.89,-6.35) F9(-10.16,-6.35) F10(-11.43,-6.35) F11(-12.7,-6.35) F12(-13.97,-6.35) F13(-15.24,-6.35) F14(-16.51,-6.35) F15(-17.78,-6.35) F16(-19.05,-6.35) F17(-20.32,-6.35) F18(-21.59,-6.35) F19(-22.86,-6.35) F20(-24.13,-6.35) F21(-25.4,-6.35) F22(-26.67,-6.35) F23(-27.94,-6.35) F24(-29.21,-6.35) F25(-30.48,-6.35) F26(-31.75,-6.35) F27(-33.02,-6.35) F28(-34.29,-6.35) F29(-35.56,-6.35) F30(-36.83,-6.35) F31(-38.1,-6.35) F32(-39.37,-6.35) F33(-40.64,-6.35) F34(-41.91,-6.35) F35(-43.18,-6.35) F36(-44.45,-6.35) F37(-45.72,-6.35) F38(-46.99,-6.35) F39(-48.26,-6.35) F40(-49.53,-6.35) G1(0,-7.62) G2(-1.27,-7.62) G3(-2.54,-7.62) G4(-3.81,-7.62) G5(-5.08,-7.62) G6(-6.35,-7.62) G7(-7.62,-7.62) G8(-8.89,-7.62) G9(-10.16,-7.62) G10(-11.43,-7.62) G11(-12.7,-7.62) G12(-13.97,-7.62) G13(-15.24,-7.62) G14(-16.51,-7.62) G15(-17.78,-7.62) G16(-19.05,-7.62) G17(-20.32,-7.62) G18(-21.59,-7.62) G19(-22.86,-7.62) G20(-24.13,-7.62) G21(-25.4,-7.62) G22(-26.67,-7.62) G23(-27.94,-7.62) G24(-29.21,-7.62) G25(-30.48,-7.62) G26(-31.75,-7.62) G27(-33.02,-7.62) G28(-34.29,-7.62) G29(-35.56,-7.62) G30(-36.83,-7.62) G31(-38.1,-7.62) G32(-39.37,-7.62) G33(-40.64,-7.62) G34(-41.91,-7.62) G35(-43.18,-7.62) G36(-44.45,-7.62) G37(-45.72,-7.62) G38(-46.99,-7.62) G39(-48.26,-7.62) G40(-49.53,-7.62) H1(0,-8.89) H2(-1.27,-8.89) H3(-2.54,-8.89) H4(-3.81,-8.89) H5(-5.08,-8.89) H6(-6.35,-8.89) H7(-7.62,-8.89) H8(-8.89,-8.89) H9(-10.16,-8.89) H10(-11.43,-8.89) H11(-12.7,-8.89) H12(-13.97,-8.89) H13(-15.24,-8.89) H14(-16.51,-8.89) H15(-17.78,-8.89) H16(-19.05,-8.89) H17(-20.32,-8.89) H18(-21.59,-8.89) H19(-22.86,-8.89) H20(-24.13,-8.89) H21(-25.4,-8.89) H22(-26.67,-8.89) H23(-27.94,-8.89) H24(-29.21,-8.89) H25(-30.48,-8.89) H26(-31.75,-8.89) H27(-33.02,-8.89) H28(-34.29,-8.89) H29(-35.56,-8.89) H30(-36.83,-8.89) H31(-38.1,-8.89) H32(-39.37,-8.89) H33(-40.64,-8.89) H34(-41.91,-8.89) H35(-43.18,-8.89) H36(-44.45,-8.89) H37(-45.72,-8.89) H38(-46.99,-8.89) H39(-48.26,-8.89) H40(-49.53,-8.89) J1(0,-10.16) J2(-1.27,-10.16) J3(-2.54,-10.16) J4(-3.81,-10.16) J5(-5.08,-10.16) J6(-6.35,-10.16) J7(-7.62,-10.16) J8(-8.89,-10.16) J9(-10.16,-10.16) J10(-11.43,-10.16) J11(-12.7,-10.16) J12(-13.97,-10.16) J13(-15.24,-10.16) J14(-16.51,-10.16) J15(-17.78,-10.16) J16(-19.05,-10.16) J17(-20.32,-10.16) J18(-21.59,-10.16) J19(-22.86,-10.16) J20(-24.13,-10.16) J21(-25.4,-10.16) J22(-26.67,-10.16) J23(-27.94,-10.16) J24(-29.21,-10.16) J25(-30.48,-10.16) J26(-31.75,-10.16) J27(-33.02,-10.16) J28(-34.29,-10.16) J29(-35.56,-10.16) J30(-36.83,-10.16) J31(-38.1,-10.16) J32(-39.37,-10.16) J33(-40.64,-10.16) J34(-41.91,-10.16) J35(-43.18,-10.16) J36(-44.45,-10.16) J37(-45.72,-10.16) J38(-46.99,-10.16) J39(-48.26,-10.16) J40(-49.53,-10.16) K1(0,-11.43) K2(-1.27,-11.43) K3(-2.54,-11.43) K4(-3.81,-11.43) K5(-5.08,-11.43) K6(-6.35,-11.43) K7(-7.62,-11.43) K8(-8.89,-11.43) K9(-10.16,-11.43) K10(-11.43,-11.43) K11(-12.7,-11.43) K12(-13.97,-11.43) K13(-15.24,-11.43) K14(-16.51,-11.43) K15(-17.78,-11.43) K16(-19.05,-11.43) K17(-20.32,-11.43) K18(-21.59,-11.43) K19(-22.86,-11.43) K20(-24.13,-11.43) K21(-25.4,-11.43) K22(-26.67,-11.43) K23(-27.94,-11.43) K24(-29.21,-11.43) K25(-30.48,-11.43) K26(-31.75,-11.43) K27(-33.02,-11.43) K28(-34.29,-11.43) K29(-35.56,-11.43) K30(-36.83,-11.43) K31(-38.1,-11.43) K32(-39.37,-11.43) K33(-40.64,-11.43) K34(-41.91,-11.43) K35(-43.18,-11.43) K36(-44.45,-11.43) K37(-45.72,-11.43) K38(-46.99,-11.43) K39(-48.26,-11.43) K40(-49.53,-11.43)
  silkscreen extent -54.16,-15.56 5.85,4.45
SG-636 [mil]
  oct 83x50 smd: 1(0,0)
  rect 83x50 smd: 2(0,-200) 3(180,-200) 4(180,0)
  silkscreen extent -20,-310 200,110
SOIC16_N [mm] "SOIC, 16-Leads, Body 9.9x3.9mm, Pitch 1.27mm, IPC Medium Density"
  oval 2.2x0.6 smd: 1(-2.4,4.445) 2(-2.4,3.175) 3(-2.4,1.905) 4(-2.4,0.635) 5(-2.4,-0.635) 6(-2.4,-1.905) 7(-2.4,-3.175) 8(-2.4,-4.445) 9(2.4,-4.445) 10(2.4,-3.175) 11(2.4,-1.905) 12(2.4,-0.635) 13(2.4,0.635) 14(2.4,1.905) 15(2.4,3.175) 16(2.4,4.445)
  silkscreen extent -2.52,-5 0.9,5.42, body extent -2,-5 2,5, height 1.91
SWD4-8 [mm]
  rect 1.1x2.6 smd: 1(0,0)
  oval 1.1x2.6 smd: 2(0,9.05) 3(2.54,0) 4(2.54,9.05) 5(5.08,0) 6(5.08,9.05) 7(7.62,0) 8(7.62,9.05) 9(10.16,0) 10(10.16,9.05) 11(12.7,0) 12(12.7,9.05) 13(15.24,0) 14(15.24,9.05) 15(17.78,0) 16(17.78,9.05)
  silkscreen extent -1.27,2.13 19.05,6.91
TO-252#1 [mil]
  rect 30x100 smd: 1(-90,0) 2(0,0) 3(90,0) 4(0,350)
  Top Layer lines w60: 100,370 0,370 ; 100,370 0,370 ; 100,370 0,370 ; 100,370 0,370 ; 0,370 -100,370 ; 0,370 -100,370 ; 0,370 -100,370 ; 0,370 -100,370
  silkscreen extent -130,70 130,370
TO-252#2 [mil]
  rect 30x100 smd: 1(-90,0) 2(0,0) 3(90,0) 4(0,350)
  Top Layer lines w60: -100,370 0,370 100,370
  silkscreen extent -130,70 130,370
TO-252#3 [mil]
  rect 30x100 smd: 1(-90,0) 2(0,0) 3(90,0) 4(0,350)
  Top Layer lines w60: -100,370 0,370 ; -100,370 0,370 ; -100,370 0,370 ; -100,370 0,370 ; 0,370 0,370 ; 0,370 0,370 ; 0,370 100,370 ; 0,370 0,370 ; 0,370 100,370 ; 0,370 0,370 ; 0,370 100,370 ; 0,370 100,370
  silkscreen extent -130,70 130,370

## Part data
C1_In_ch1 C1_In_Ch2 C1_In_Ch3 C1_In_Ch4 C1_In_Ch5 C3_In_ch1 C3_In_Ch2 C3_In_Ch3 C3_In_Ch4 C3_In_Ch5 C4 C5 C6 C7 C8 C9 C10 C11 C12 C13 C14 C15 C16 C17 C18 C19 C20 C21 C22 C23 C24 C25 C26 Cgen1 CL1 CLED CLED1 CLED2 CLED3 Csup4 Csup5 Csup6 Csup7 Csup8 Csup9 Csup10 Csup11 Csup17 Csup18 Csup19 Csup20 Csup21: library part C
C2_In_ch1 C2_In_Ch2 C2_In_Ch3 C2_In_Ch4 C2_In_Ch5 Csup1 Csup2 Csup3 Csup12 Csup13 Csup14 Csup15 Csup16: library part "C POL"
ExtReset R3 R4 R5 R6 R7 R8 R9 RL1 RL2 RL3 RL4 RLED1 RLED2 RLED3: library part R
Lref1 Lref2 Lref3: library part DR
U1: "Cyclone IV Family FPGA, 2V Core, 324 I/O Pins, 4 PLLs, 484-Pin FBGA, Speed Grade 6, Commercial Grade"
UG1: library part SG-636, "Crystal Oscillator (SMD)"
Usup2 Usup3 Usup4 Usup5 Usup_ch1_In_ch1 Usup_ch1_In_Ch2 Usup_ch1_In_Ch3 Usup_ch1_In_Ch4 Usup_ch1_In_Ch5: library part NCP1117-3.3V
VDLED1 VDLED2 VDLED3: library part AL307

## Free pads (board coordinates)
  round 0 hole 3: 0(33.62,29.75) 0(33.62,152.25) 1(53.94,29.75) 1(53.94,152.25) 2(74.26,29.75) 2(74.26,152.25) 3(94.58,29.75) 3(94.58,152.25) 4(114.9,29.75) 4(114.9,152.25) 5(135.22,29.75) 5(135.22,152.25) 6(155.54,29.75) 6(155.54,152.25) 7(175.86,29.75) 7(175.86,152.25) 8(196.18,29.75) 8(196.18,152.25) 9(216.5,29.75) 9(216.5,152.25)

## Via types
v1: diameter 0.5, hole 0.25, Top Layer to Bottom Layer, tented top, 267 vias
v2: diameter 0.6, hole 0.3, Top Layer to Bottom Layer, 60 vias
v3: diameter 1.3, hole 0.7, Top Layer to Bottom Layer, 50 vias
v4: diameter 0.7, hole 0.5, Top Layer to Bottom Layer, tented top, 30 vias
v5: diameter 0.5, hole 0.3, Top Layer to Bottom Layer, 4 vias
v6: diameter 2, hole 1.27, Top Layer to Bottom Layer, 2 vias
v7: diameter 0.7, hole 0.5, Top Layer to Bottom Layer, 2 vias
v8: diameter 0.7, hole 0.4, Top Layer to Bottom Layer, 2 vias
v9: diameter 1.27, hole 0.711, Top Layer to Bottom Layer, 2 vias
v10: diameter 3, hole 3, Top Layer to Bottom Layer, tented top, 2 vias

## Nets (pads, with @x,y where several pads share a name; then routed paths per layer and width w, separated by ;. In a path a pad name is that pad's centre, name@x,y a point inside that pad or via, vN(x,y) a via of type N, cw(c..) or ccw(c..) an arc to the next point about the centre after c; other vN are vias at no path point)
"+1.2 V": C19.2 C20.2 C21.2 C22.2 C23.2 C24.2 C25.2 C26.2 Csup16.+ Csup21.1 U1.E17 U1.F6 U1.G12 U1.H9 U1.H11 U1.H15 U1.J8 U1.J10 U1.J11 U1.J12 U1.J13 U1.J14 U1.J16 U1.K8 U1.K9 U1.K14 U1.K15 U1.L7 U1.L9 U1.L14 U1.L16 U1.M8 U1.M9 U1.M14 U1.M15 U1.N9 U1.N14 U1.P9 U1.P10 U1.P11 U1.P12 U1.P13 U1.P14 U1.P15 U1.R8 U1.R10 U1.R12 U1.T7 U1.T9 U1.T13 U1.U6 U1.V17 Usup5.2 Usup5.4 | length 205.1
  Top Layer w0.175: v1(154,98) U1.U6@154.5,98.5 U1.P9@157.5,101.5 ; v1(154,110) U1.F6@154.5,109.5 ; v1(155,99) U1.T7@155.5,99.5 ; v1(155,105) U1.L7@155.5,104.5 ; v1(156,100) U1.R8@156.5,100.5 ; v1(156,103) U1.M8@156.5,103.5 U1.M9@157.5,103.5 ; v1(156,106) U1.K8@156.5,105.5 ; v1(156,107) U1.J8@156.5,106.5 U1.K8@156.5,105.5 ; v1(157,99) U1.T9@157.5,99.5 v1(159,101) U1.P11@159.5,101.5 ; v1(157,101) U1.P9@157.5,101.5 ; v1(157,102) U1.N9@157.5,102.5 ; v1(157,103) U1.M9@157.5,103.5 ; v1(157,105) U1.L9@157.5,104.5 ; v1(157,106) U1.K9@157.5,105.5 ; v1(157,108) U1.H9@157.5,107.5 v1(158,107) U1.J10@158.5,106.5 U1.J11@159.5,106.5 ; U1.L9@157.5,104.5 U1.K9@157.5,105.5 ; v1(158,100) U1.R10@158.5,100.5 ; v1(158,101) U1.P10@158.5,101.5 ; v1(159,107) U1.J11@159.5,106.5 ; v1(159,108) U1.H11@159.5,107.5 U1.J11@159.5,106.5 ; U1.G12@160.5,108.5 v1(161,109) ; v1(161,100) U1.R12@160.5,100.5 ; v1(161,101) U1.P12@160.5,101.5 U1.R12@160.5,100.5 ; v1(161,107) U1.J12@160.5,106.5 ; U1.P13@161.5,101.5 v1(162,101) ; v1(162,99) U1.T13@161.5,99.5 U1.R12@160.5,100.5 ; v1(162,107) U1.J13@161.5,106.5 ; v1(163,101) U1.P14@162.5,101.5 ; v1(163,102) U1.N14@162.5,102.5 ; v1(163,103) U1.M14@162.5,103.5 ; v1(163,105) U1.L14@162.5,104.5 U1.K14@162.5,105.5 ; v1(163,106) U1.K14@162.5,105.5 ; v1(164,101) U1.P15@163.5,101.5 U1.P14@162.5,101.5 ; v1(164,103) U1.M15@163.5,103.5 U1.M14@162.5,103.5 ; v1(164,108) U1.H15@163.5,107.5 v1(163,107) U1.J14@162.5,106.5 ; U1.L16@164.5,104.5 v1(165,105) ; v1(165,107) U1.J16@164.5,106.5 v1(164,106) U1.K15@163.5,105.5 U1.K14@162.5,105.5 ; U1.V17@165.5,97.5 v1(166,97) ; U1.E17@165.5,110.5 v1(166,111) ; U1.K8@156.5,105.5 U1.K9@157.5,105.5 ; U1.P9@157.5,101.5 U1.P14@162.5,101.5 ; U1.P9@157.5,101.5 U1.N9@157.5,102.5 ; U1.N9@157.5,102.5 U1.M9@157.5,103.5 ; U1.J11@159.5,106.5 U1.J12@160.5,106.5 ; U1.J12@160.5,106.5 U1.J13@161.5,106.5 ; U1.J13@161.5,106.5 U1.J14@162.5,106.5 ; U1.P14@162.5,101.5 U1.N14@162.5,102.5 ; U1.N14@162.5,102.5 U1.M14@162.5,103.5 ; U1.K14@162.5,105.5 U1.J14@162.5,106.5
  Top Layer w0.508: Csup16.+@150.89,75.398 154.96,75.398 157.5,75.398 v3(157.5,78) ; Csup21.1@157.5,63.356 Usup5.2@157.5,66 Usup5.4@157.5,74.89
  Mid-Layer 4 w0.2: v1(154,98) 154.5,98.5 154.5,102.5 ; v1(154,110) 154.5,109.5 154.5,105 ; 154.793,102.5 154.5,102.5 ; v1(155,105) 154.5,105 ; v1(161,109) 161.5,108.5 165.5,108.5 ; v1(166,97) 165.5,97.5 165.5,108.5 ; v1(166,111) 165.5,110.5 165.5,108.5 ; 154.5,102.5 154.5,105
  Mid-Layer 4 w0.508: v3(157.5,78) 157.5,86.9 159.7,89.1 159.7,100.3 ; 160.4,101 159.7,100.3 ; 160.4,107 159.7,106.3 159.7,100.3
  Bottom Layer w0.5: v1(154,98) v1(157,101)
  Bottom Layer w0.508: v1(156,103) C19.2@156,103.644 C19.2@156,104 ; v1(157,99) v1(158,100) v1(158,101) ; v1(159,108) C23.2@159.644,108 C23.2@160,108 ; v1(161,109) C23.2@160,108 ; v1(162,99) v1(161,100) C22.2@160.356,100 C22.2@160,100 C22.2@160,100.254 C25.2@160,100.746 C25.2@160,101 ; C20.2@163,104 C20.2@163.254,104 C24.2@163.746,104 C24.2@164,104 ; v1(164,101) v1(163,101) ; v1(164,103) C24.2@164,103.644 C24.2@164,104 ; C19.2@156,104 v1(155,105) v1(156,106) ; C19.2@156,104 C19.2@156.254,104 C21.2@156.746,104 C21.2@157,104 ; v1(156,106) v1(156,107) v1(157,108) v1(158,107) C26.2@159.644,107 C26.2@160,107 ; v1(156,106) v1(157,106) v1(157,105) C21.2@157,104 ; v1(157,103) C21.2@157,104 ; v1(157,103) v1(157,101) v1(158,101) ; v1(157,103) C21.2@157,103.644 C21.2@157,104 ; v1(158,101) C25.2@160,101 ; C25.2@160,101 v1(163,101) ; C26.2@160,107 C26.2@160,107.254 C23.2@160,107.746 C23.2@160,108 ; C26.2@160,107 C26.2@160.356,107 v1(163,107) ; v1(163,101) v1(163,106) ; v1(163,106) v1(164,106) ; v1(163,106) v1(163,107) ; v1(163,107) v1(164,108) v1(165,107) v1(164,106) ; C24.2@164,104 v1(165,105) v1(164,106)